# Altium PCB ISL6236_V2.PcbDoc
Units mm, origin at the board's own origin, x right, y up, seen from the top; angles counter-clockwise.
Board outline 50 x 50 mm, 6 copper layers (L1, L2, L3, L4, L5, L6), stack 0.816 mm thick; 41 components, 28 nets, 119 pads, 93 vias.
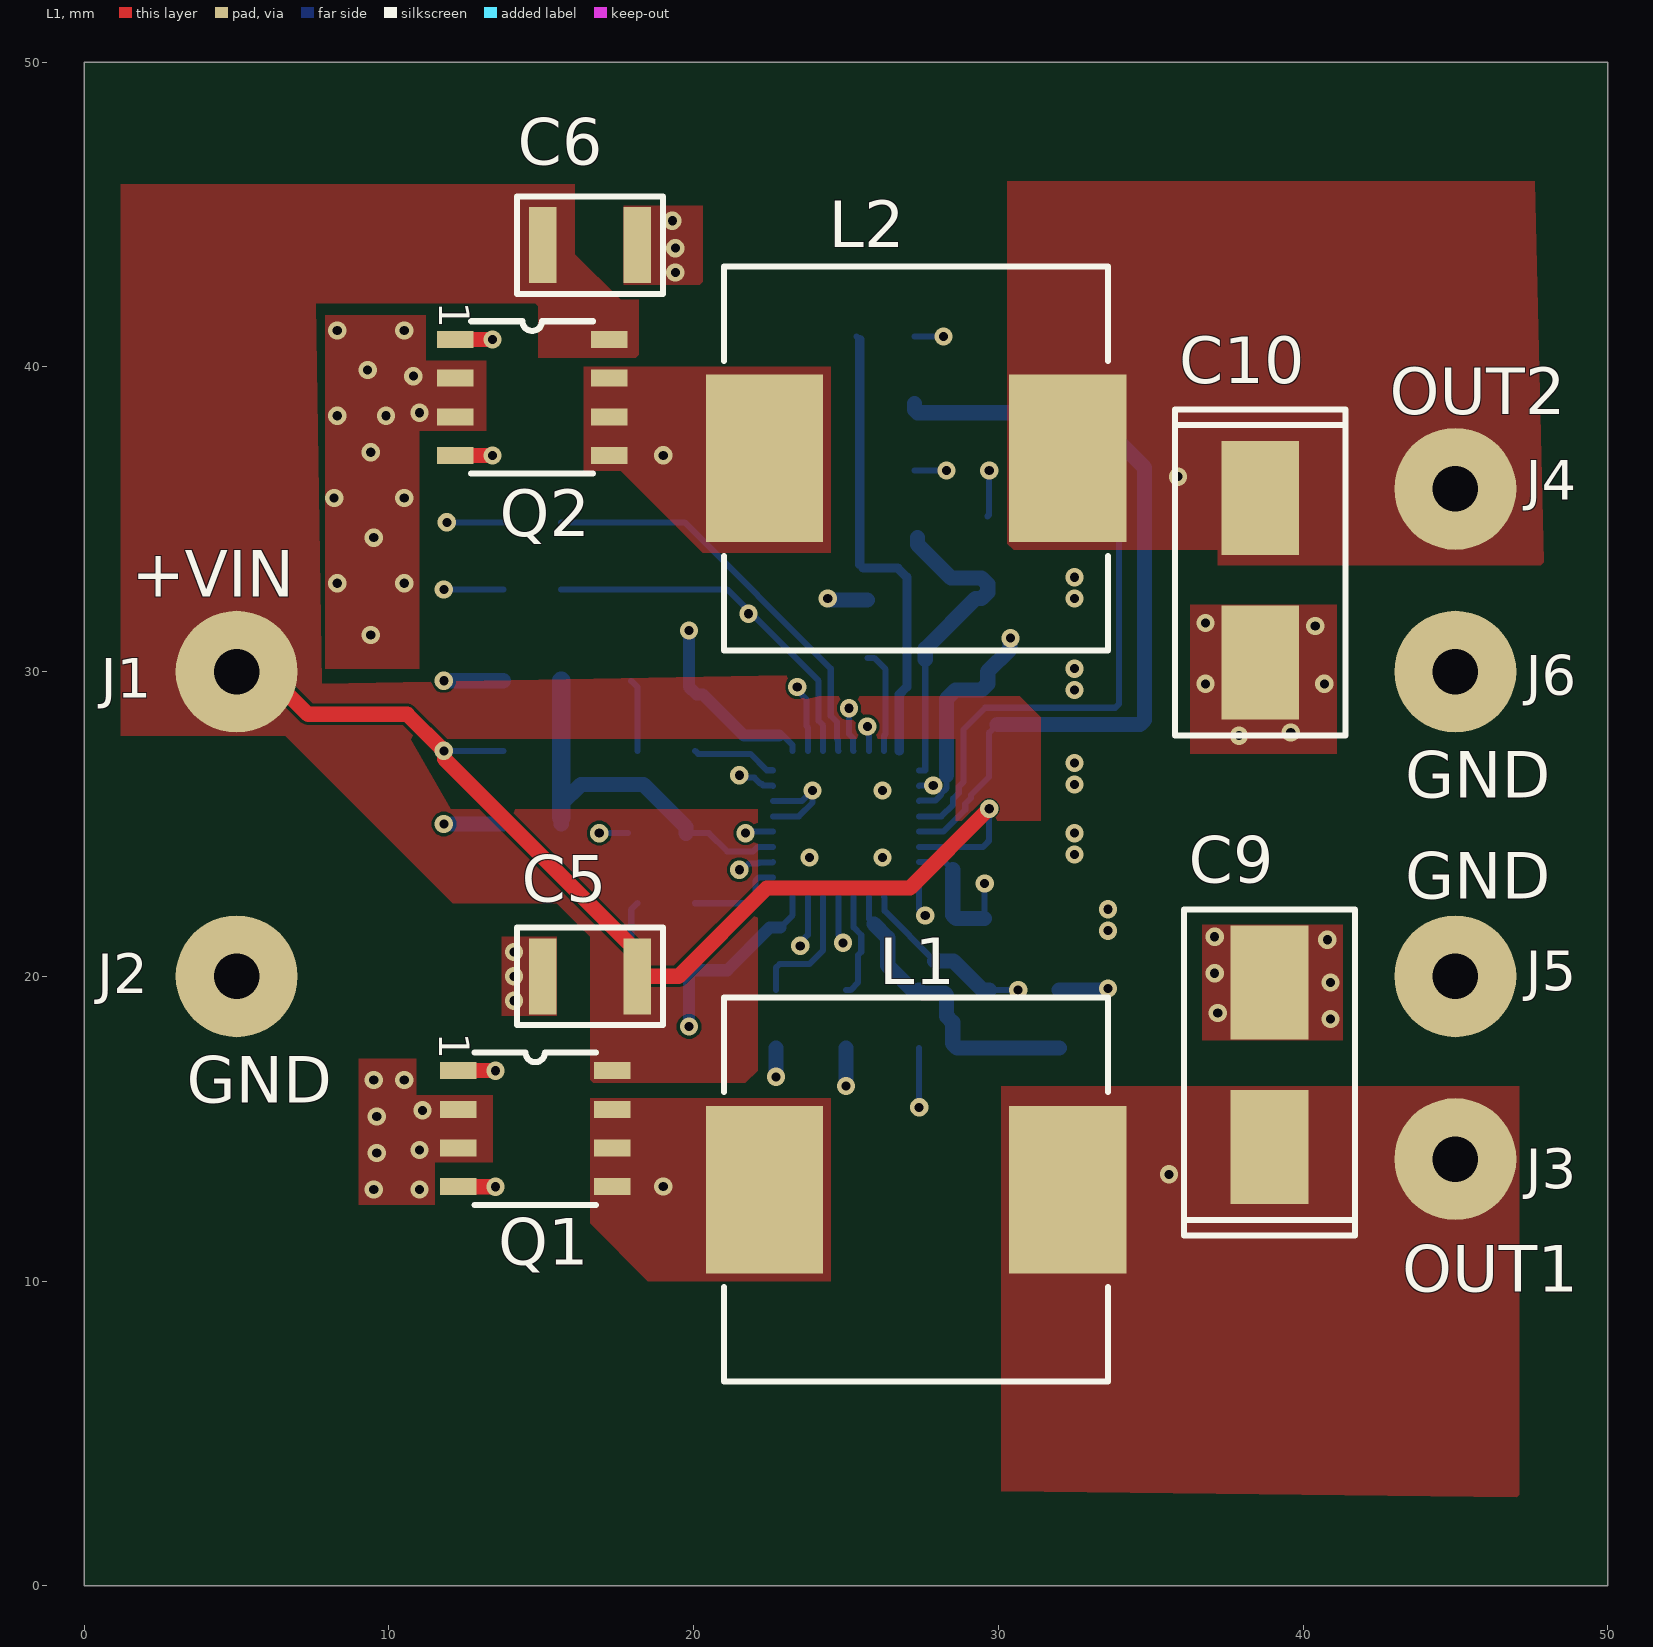
[diagram p0: L1 view]
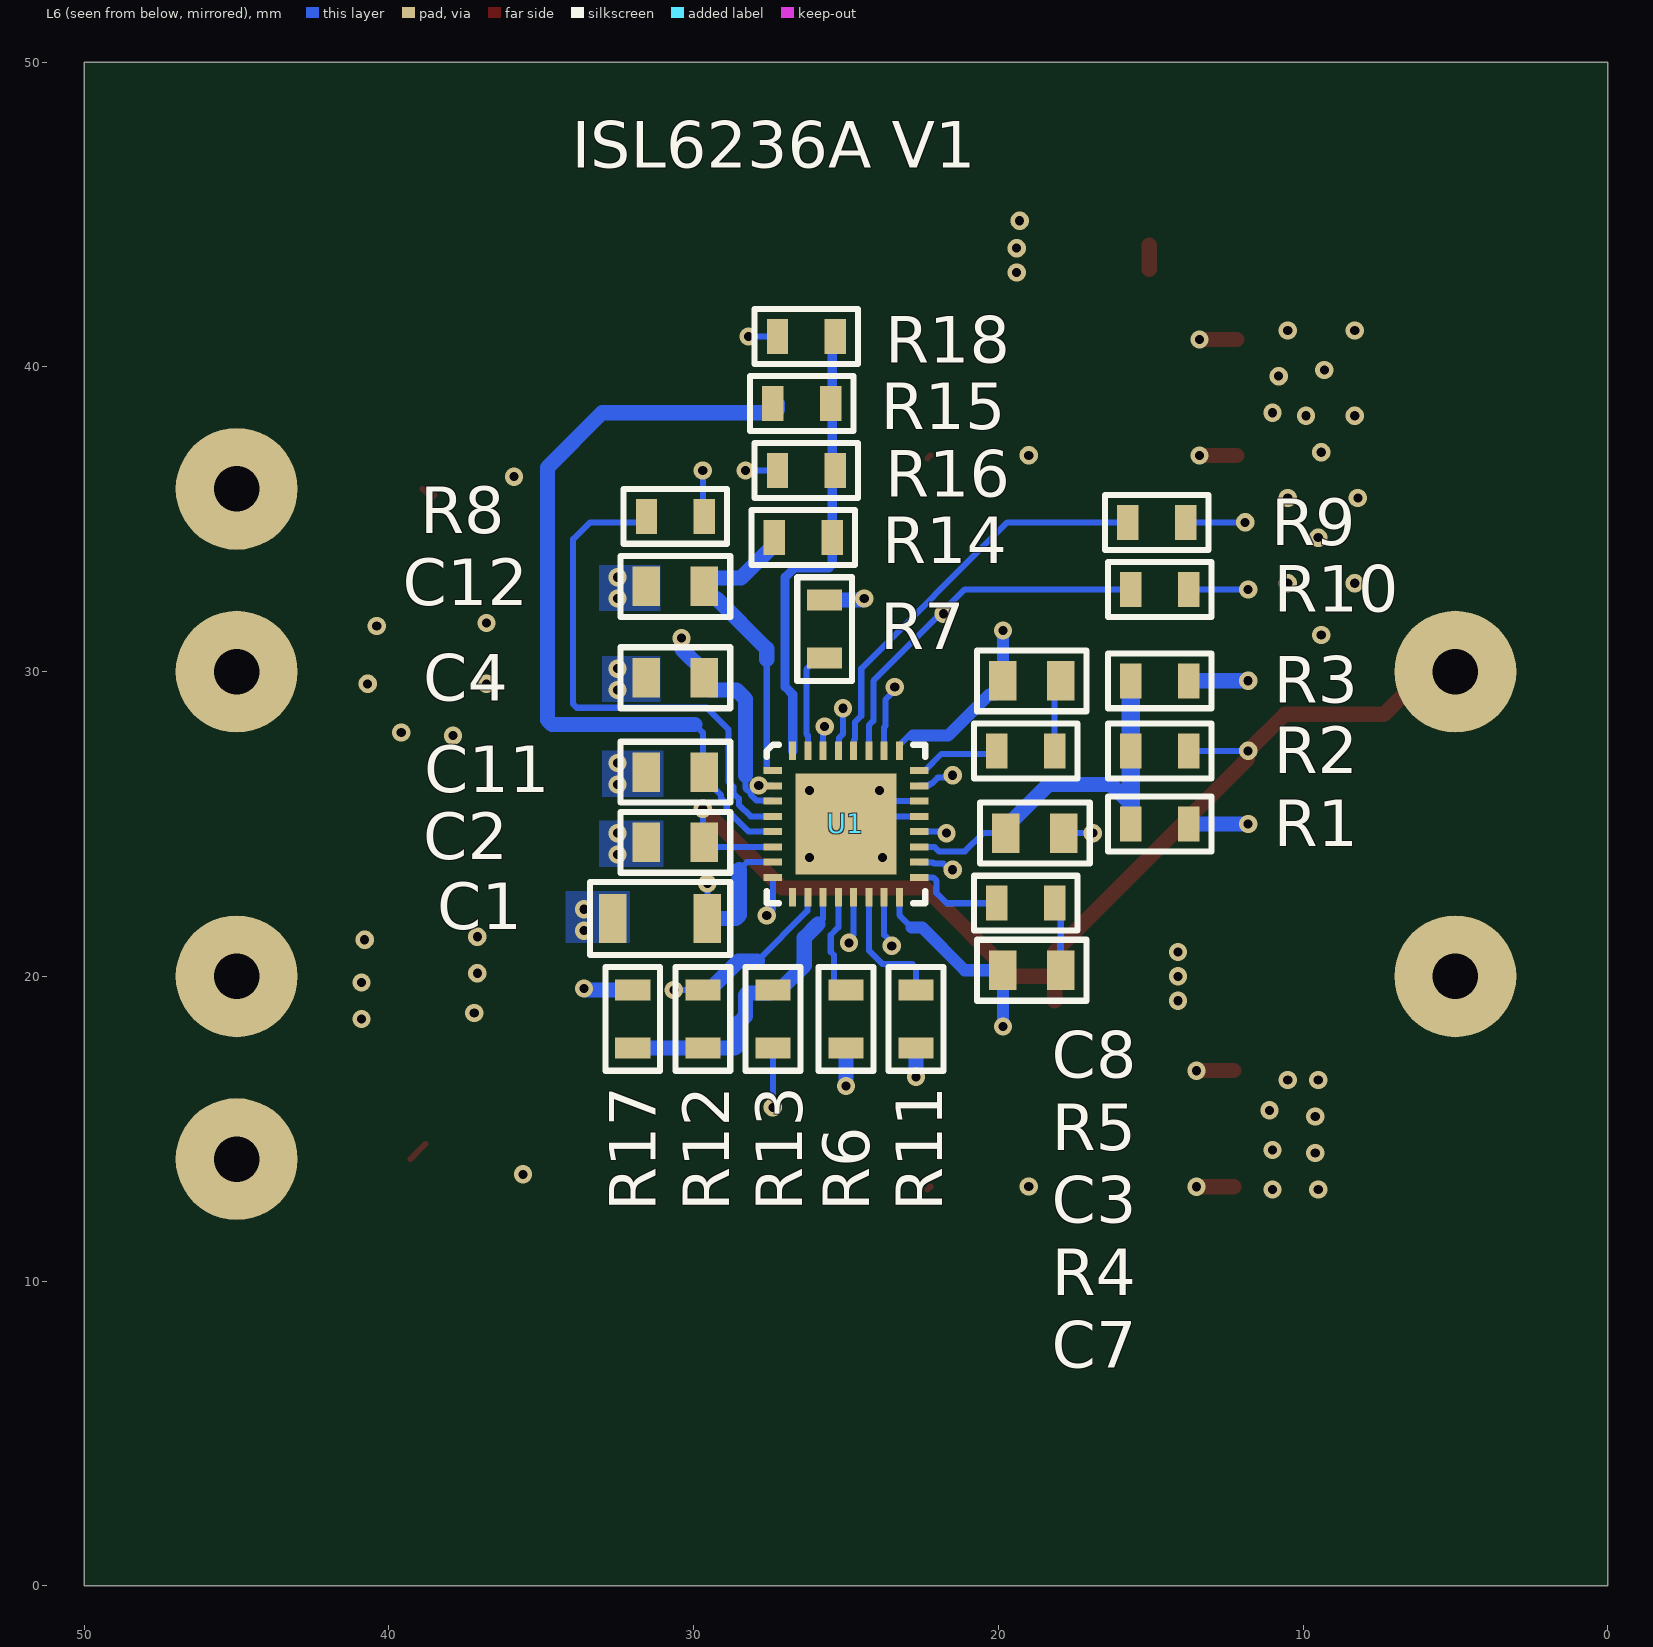
[diagram p1: L6 view, seen from below]
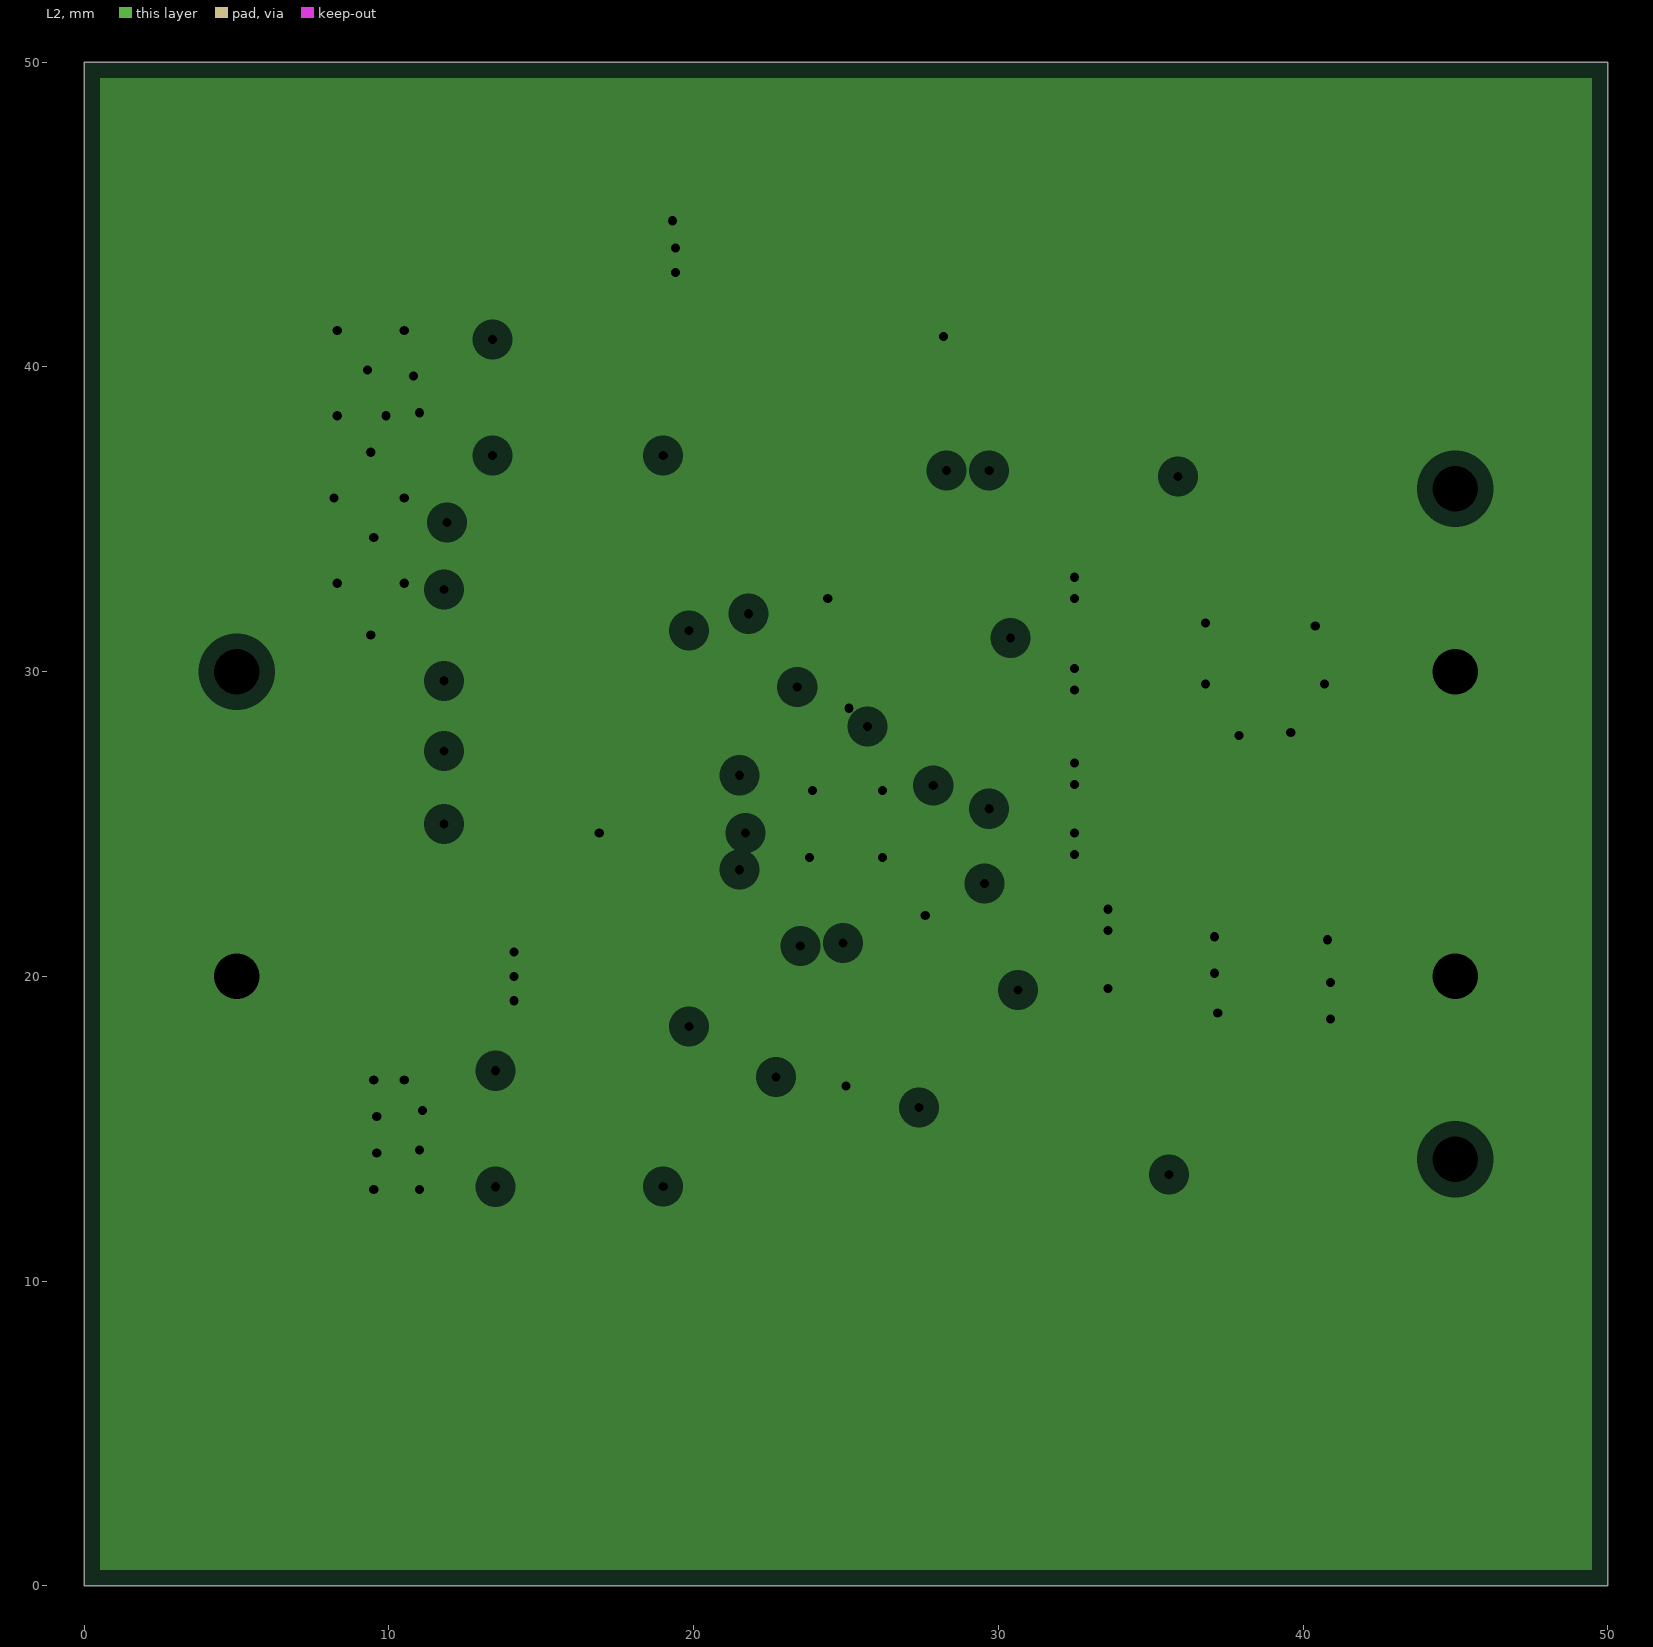
[diagram p2: L2, clearances drawn from the general rule]
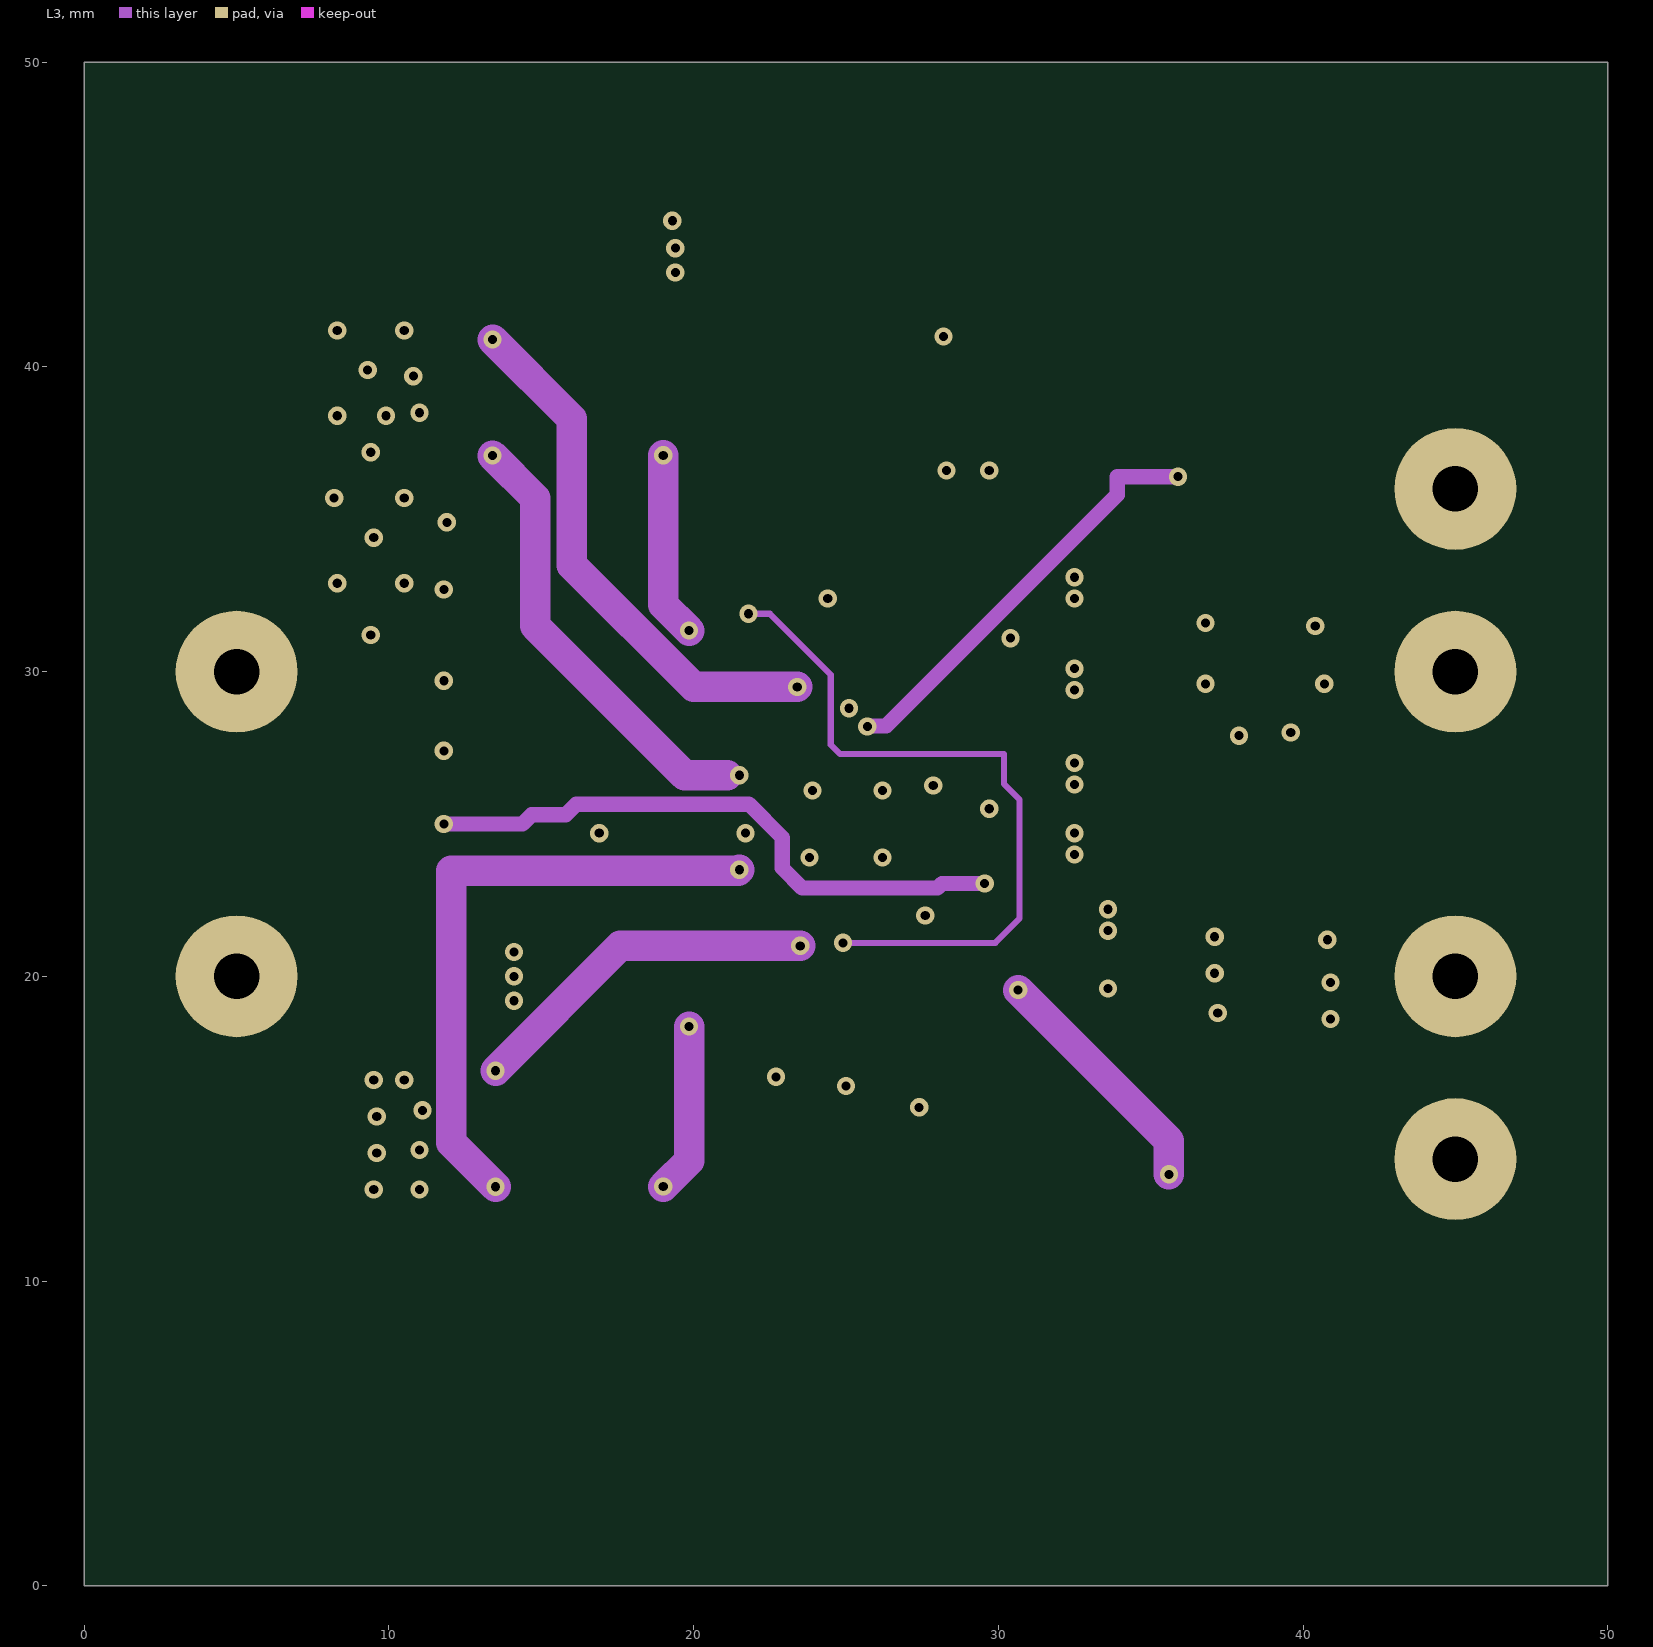
[diagram p3: L3]
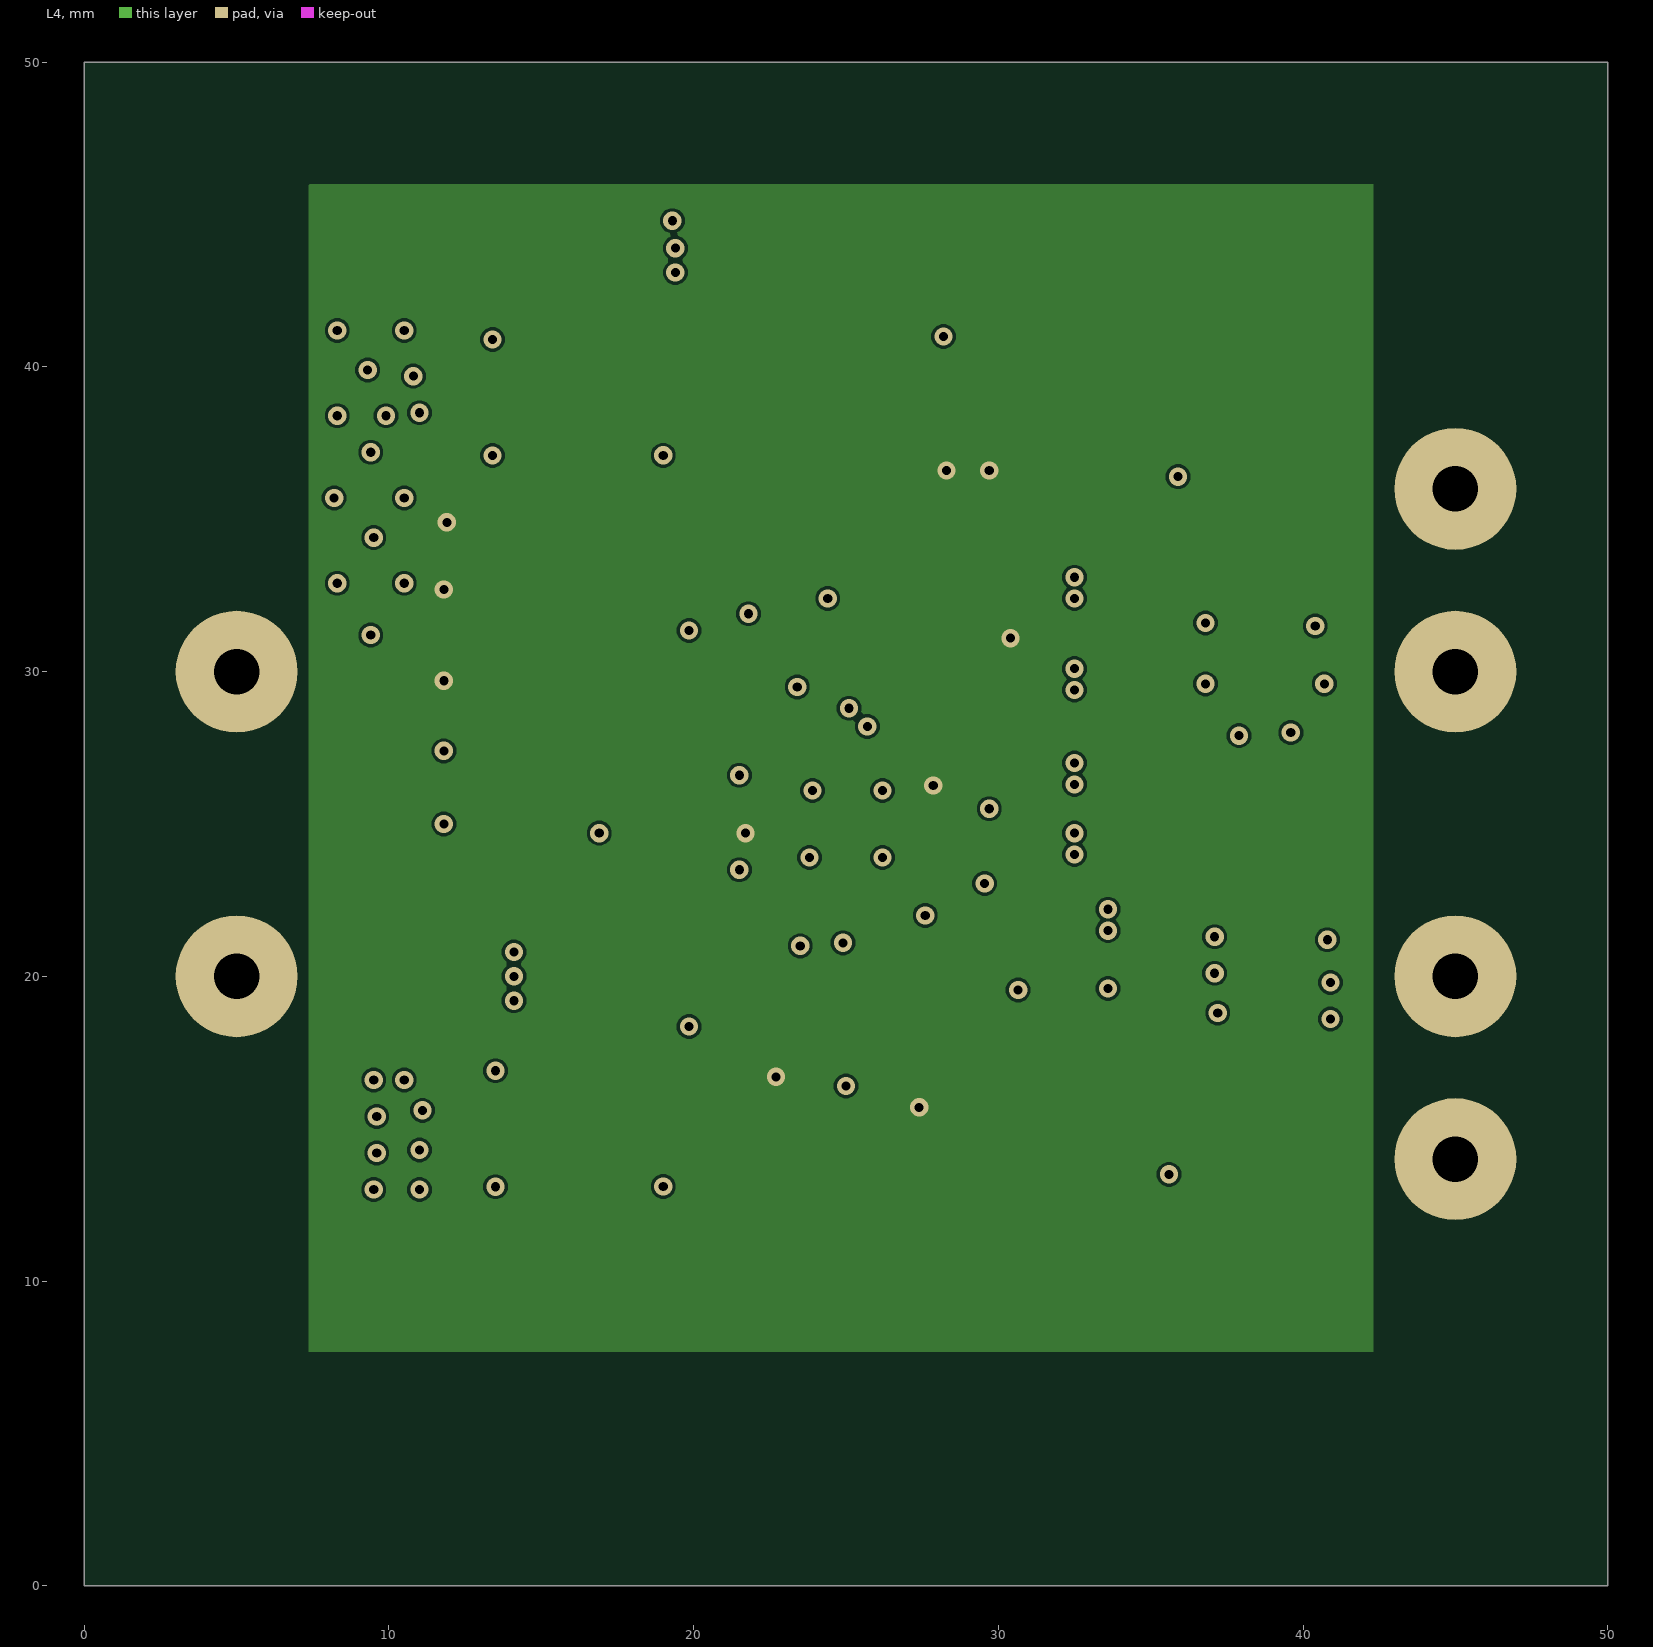
[diagram p4: L4]
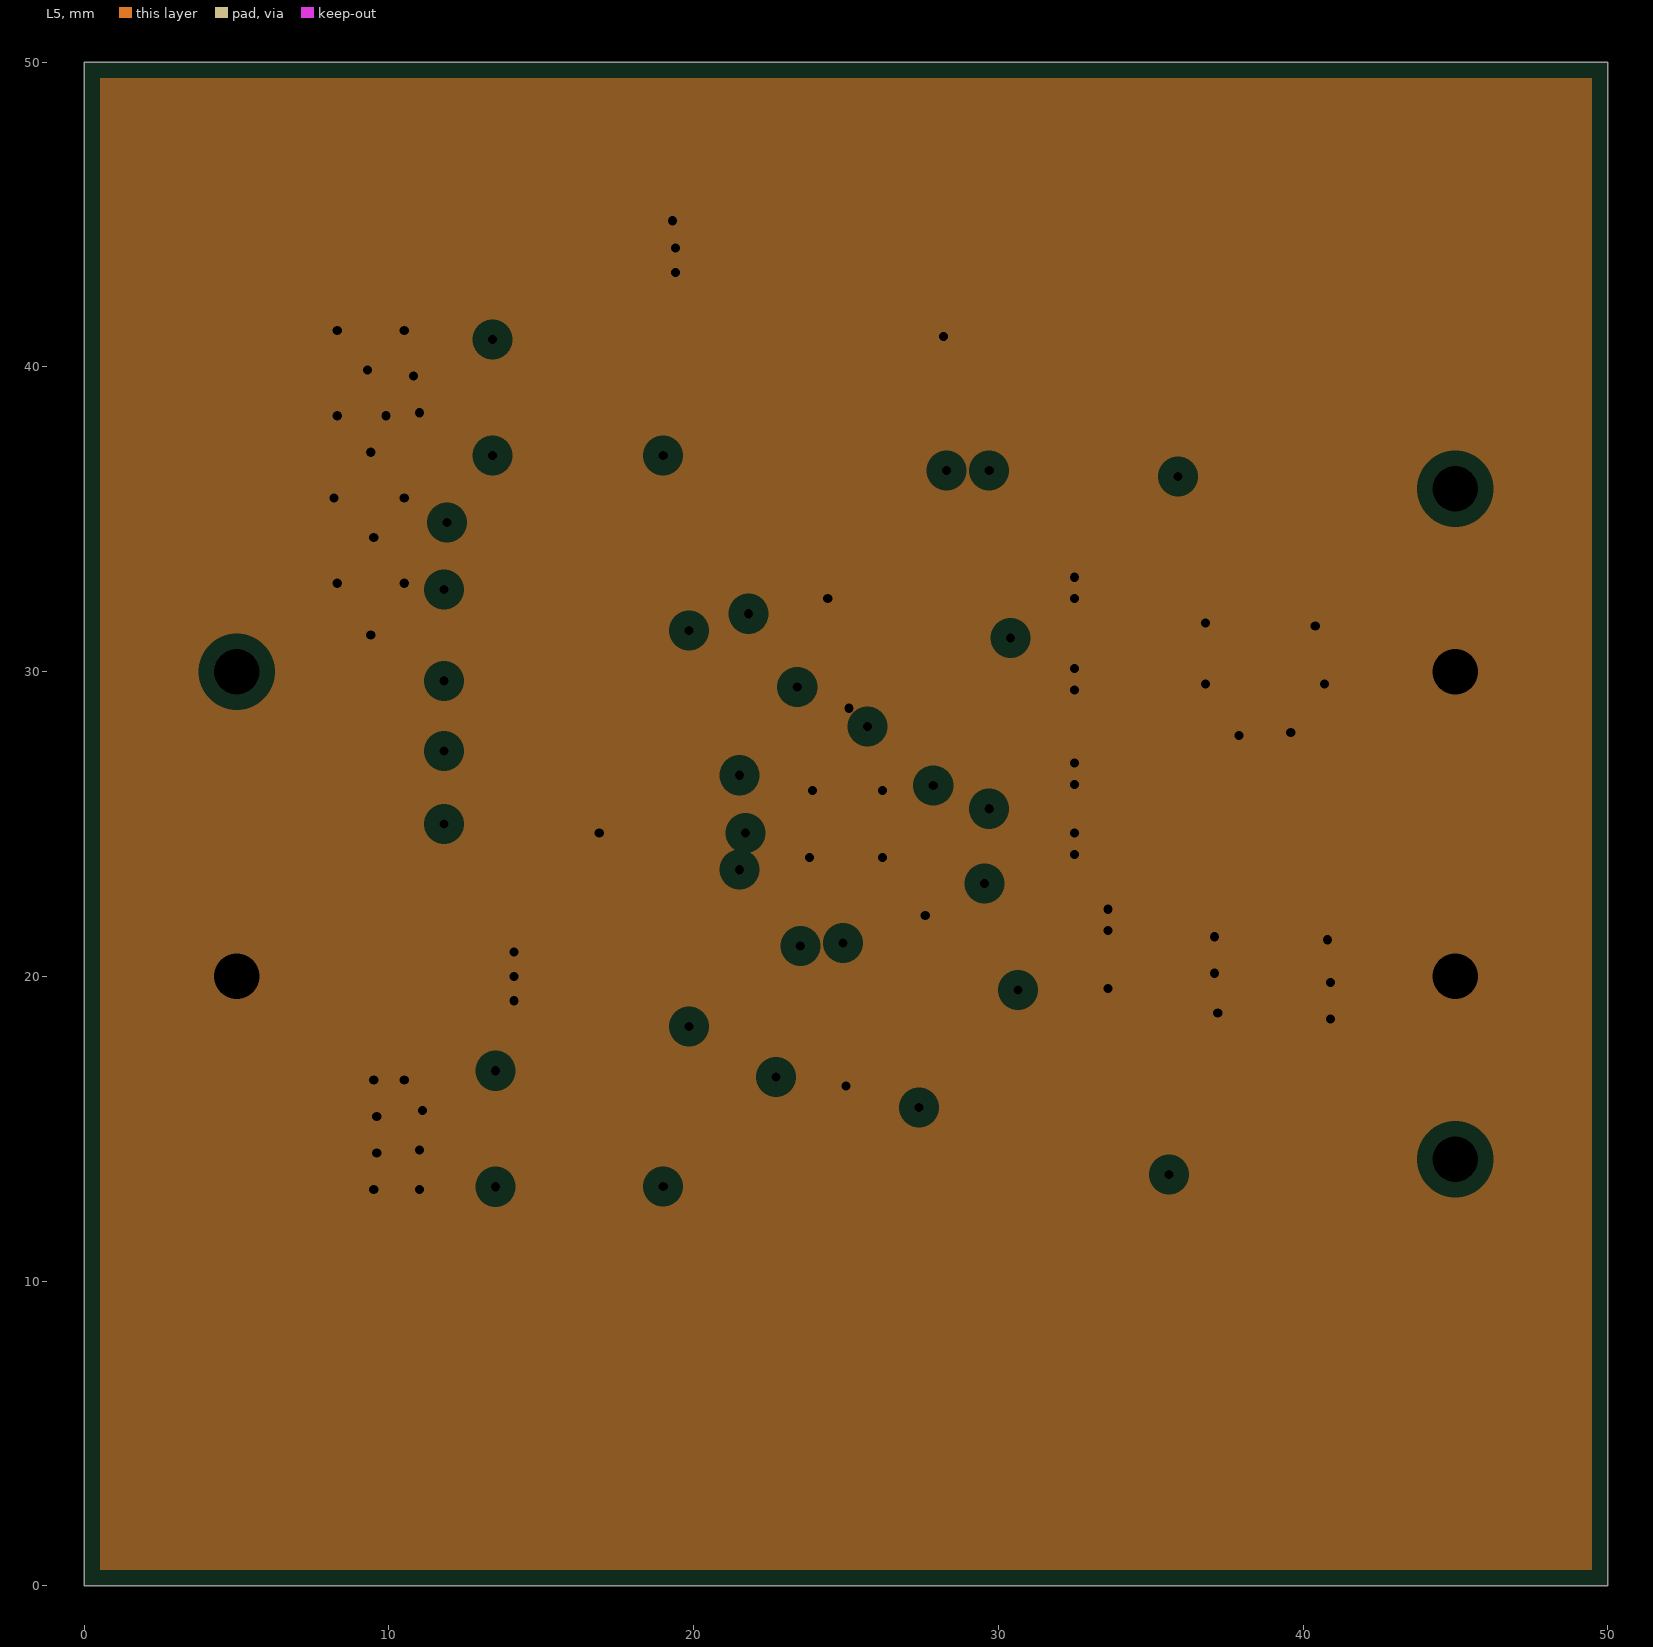
[diagram p5: L5, clearances drawn from the general rule]

## Layer stack, top to bottom
Top Solder: solder mask 0.0102, Solder Resist, Dk 3.5
L1: signal copper 0.0356
Dielectric 2: prepreg 0.0711, PP-006, Dk 4.1
L2: plane copper 0.035, net GND
Dielectric 3: prepreg 0.0711, PP-006, Dk 4.1
L3: signal copper 0.035
Dielectric 4: prepreg 0.0711, PP-006, Dk 4.1
L4: signal copper 0.035
Dielectric 5: prepreg 0.0711, PP-006, Dk 4.1
L5: plane copper 0.035, net GND
Dielectric 1: dielectric 0.32, FR-4, Dk 4.8
L6: signal copper 0.0356
Bottom Solder: solder mask 0.0102, Solder Resist, Dk 3.5

## Board outline
0,0 50,0 50,50 0,50

## Design rules (kind name [scope] priority, off if disabled: settings)
Clearance [All] p1: gap=0.1 ignorepadtopadclearanceinfootprint=FALSE
ComponentClearance [All] p1: gap=0.099 collisioncheckmode=3 verticalgap=0.099 showdistances=FALSE
MinimumSolderMaskSliver [All] p1: minsoldermaskwidth=0.1
PlaneClearance [All] p1: clearance=0.508
PlaneConnect [All] p1: planeconnectstyle=Relief reliefexpansion=0.508 reliefentries=4 reliefconductorwidth=0.254 reliefairgap=0.254
PolygonConnect [All] p1: connectstyle=Direct reliefconductorwidth=0.254 reliefentries=4 polygonreliefangle="90 Angle" airgapwidth=0.254
RoutingVias [All] p1: holewidth=0.3 width=0.6 viastyle="Through Hole" minholewidth=0.3 minwidth=0.6 maxholewidth=0.3 maxwidth=0.6
SilkToSilkClearance [All] p1: silktosilkclearance=0.1
SilkToSolderMaskClearance [IsPad] p1: minsilkscreentomaskgap=0.1 clearancetoexposedcopper=TRUE
SolderMaskExpansion [All] p1: expansion=0.102 istentingtop=FALSE
Width [All] p1: maxlimit=10 minlimit=0.2 preferedwidth=0.2
24 further rules are at their usual default settings.

## Components (designator, comment, footprint, x,y, rotation, side; value= is the part's Value field where it differs from the comment)
C1 "4.7uF, 10V" C1206 31.1,21.9 r180 bottom
C2 "1uF, 50V" C0805 30.6,24.4 r180 bottom
C3 "1uF, 50V" C0805 18.8,24.7 r0 bottom
C4 "1uF, 50V" C0805 30.6,29.8 r180 bottom
C5 "10uF, 50V" CAP1210 16.6,20 r0 top
C6 "10uF, 50V" CAP1210 16.6,44 r180 top
C7 "100nF" C0805 18.9,20.2 r180 bottom
C8 "220nF" C0805 18.9,29.7 r0 bottom
C9 "330uF, 10V" CAP_734343 38.9,17.1 r90 top
C10 "330uF, 10V" CAP_734343 38.6,33 r270 top
C11 "10nF" C0805 30.6,26.7 r0 bottom
C12 "100nF" C0805 30.6,32.8 r0 bottom
J1 "4MM*1.5MM" PAD_WITH_HOLE_4MMx1.5MM 5,30 r0 top
J2 "4MM*1.5MM" PAD_WITH_HOLE_4MMx1.5MM 5,20 r0 top
J3 "4MM*1.5MM" PAD_WITH_HOLE_4MMx1.5MM 45,14 r0 top
J4 "4MM*1.5MM" PAD_WITH_HOLE_4MMx1.5MM 45,36 r0 top
J5 "4MM*1.5MM" PAD_WITH_HOLE_4MMx1.5MM 45,20 r0 top
J6 "4MM*1.5MM" PAD_WITH_HOLE_4MMx1.5MM 45,30 r0 top
L1 "3u3, DR125-3R3-R" DR125 27.3,13 r180 top
L2 "2u2, DR125-2R2-R" DR125 27.3,37 r0 top
Q1 "SI4816BDY-T1-E3" SO-8 14.8,15 r0 top
Q2 "SI4816BDY-T1-E3" SO-8 14.7,39 r0 top
R1 "0R" R0805KTR10 14.7,25 r180 bottom
R2 "0R" R0805KTR10 14.7,27.4 r0 bottom
R3 "10R" R0805KTR10 14.7,29.7 r180 bottom
R4 "1R" R0805KTR10 19.1,22.4 r0 bottom
R5 "1R" R0805KTR10 19.1,27.4 r180 bottom
R6 "200k" R0805KTR10 25,18.6 r90 bottom
R7 "200k" R0805KTR10 25.7,31.4 r90 bottom
R8 "10K" R0805KTR10 30.6,35.1 r180 bottom
R9 "200k" R0805KTR10 14.8,34.9 r180 bottom
R10 "200k" R0805KTR10 14.7,32.7 r180 bottom
R11 "10K" R0805KTR10 22.7,18.6 r270 bottom
R12 "DNF" R0805KTR10 29.7,18.6 r90 bottom
R13 "0R" R0805KTR10 27.4,18.6 r270 bottom
R14 "DNF" R0805KTR10 26.4,34.4 r0 bottom
R15 "0R" R0805KTR10 26.45,38.8 r0 bottom
R16 "DNF" R0805KTR10 26.3,36.6 r0 bottom
R17 "DNF" R0805KTR10 32,18.6 r270 bottom
R18 "DNF" R0805KTR10 26.3,41 r180 bottom
U1 "ISL6236AIRZ-T" L3255xB 25,25 r180 bottom

## Footprints (in the part's own frame and the unit in brackets; to place one, negate y for a bottom-side part, rotate by r counter-clockwise, add the part's x,y. Pads: shape width x height; smd on the part's side, far side on the other; paste and mask are expansions set on the pad)
C0805 [mm]
  rect 0.9x1.3 smd: 1(-0.95,0) 2(0.95,0)
  silkscreen extent -1.8,-1 1.8,1
C1206 [mm]
  rect 0.9x1.6 smd: 1(-1.55,0) 2(1.55,0)
  silkscreen extent -2.3,-1.2 2.3,1.2
CAP1210 [mm]
  rect 0.9x2.5 smd: 1(-1.55,0) 2(1.55,0)
  silkscreen extent -2.4,-1.6 2.4,1.6
CAP_734343 [mm]
  rect 3.75x2.55 smd: 1(-2.7,0) 2(2.7,0)
  silkscreen extent -5.6,-2.8 5.1,2.8
DR125 [mm]
  rect 3.85x5.5 smd: 1(-4.975,0) 2(4.975,0)
  silkscreen extent -6.3,-6.3 6.3,6.3
L3255xB [mm]
  rect 0.6x0.23 smd paste+0.051 mask+0.051: 1(-2.4,1.75) 2(-2.4,1.25) 3(-2.4,0.75) 4(-2.4,0.25) 5(-2.4,-0.25) 6(-2.4,-0.75) 7(-2.4,-1.25) 8(-2.4,-1.75) 17(2.4,-1.75) 18(2.4,-1.25) 19(2.4,-0.75) 20(2.4,-0.25) 21(2.4,0.25) 22(2.4,0.75) 23(2.4,1.25) 24(2.4,1.75)
  rect 0.23x0.6 smd paste+0.051 mask+0.051: 9(-1.75,-2.4) 10(-1.25,-2.4) 11(-0.75,-2.4) 12(-0.25,-2.4) 13(0.25,-2.4) 14(0.75,-2.4) 15(1.25,-2.4) 16(1.75,-2.4) 25(1.75,2.4) 26(1.25,2.4) 27(0.75,2.4) 28(0.25,2.4) 29(-0.25,2.4) 30(-0.75,2.4) 31(-1.25,2.4) 32(-1.75,2.4)
  rect 3.3x3.3 smd paste+0.051 mask+0.051: 33(0,0)
  silkscreen extent -2.6,-2.6 2.6,2.6
PAD_WITH_HOLE_4MMx1.5MM [mm]
  round 4 hole 1.5: 1(0,0)
R0805KTR10 [mm]
  rect 0.7x1.15 smd: 1(-0.95,0) 2(0.95,0)
  silkscreen extent -1.7,-0.9 1.7,0.9
SO-8 [mm]
  rect 1.194x0.559 smd: 1(-2.527,1.905) 2(-2.527,0.635) 3(-2.527,-0.635) 4(-2.527,-1.905) 5(2.527,-1.905) 6(2.527,-0.635) 7(2.527,0.635) 8(2.527,1.905)
  silkscreen extent -2,-2.5 2,2.5

## Part data
C1: library part 1206ZD475JAT2A, "Multilayer Ceramic Capacitors MLCC - SMD/SMT 10V 4.7uF X5R 1206 5% Tol", Capacitance=4.7uF, Case Code (Imperial)=1206, Case Code (Metric)=3216, Dielectric=X5R, Manufacturer="Kyocera AVX", Max Operating Temperature=85°C, Min Operating Temperature=-55°C, Package Quantity=2000, Supplier Part Number 1=478-12253-1-ND, Tolerance=5%, Voltage Rating=10V, Case/Package=1206, Category="Ceramic Capacitors", ComponentLink1Description=https://datasheet.ciiva.com/11570/cx5r-11570917.pdf?src-supplier=Avnet, ComponentLink1URL=https://datasheet.ciiva.com/11570/cx5r-11570917.pdf?src-supplier=Avnet, ComponentLink2Description=https://datasheet.ciiva.com/6268/cx5r-6268857.pdf?src-supplier=Digi-Key, ComponentLink2URL=https://datasheet.ciiva.com/6268/cx5r-6268857.pdf?src-supplier=Digi-Key, Depth=1.6mm, Height=0.07mm, Length=3.2mm, Manufacturer Part Number=1206ZD475JAT2A, Mount="Surface Mount", Packaging="Tape and Reel", Pricing 1="1=1.31000, 10=1.03500, 50=0.89700, 100=0.77620, 500=0.58650, 1000=0.51750 (USD)", Radiation Hardening=No, RoHS=Yes, Stock 1=9486, Supplier 1=Digi-Key, Termination=SMD/SMT, Thickness=0.037inch, Voltage Rating (DC)=10V, Weight=0.000571oz, Width=0.063inch
C2 C3 C4: library part C2012X7R1H105K125AB, "TDK - C2012X7R1H105K125AB - SMD Multilayer Ceramic Capacitor, 1 µF, 50 V, 0805 [2012 Metric], ± 10%, X7R, C Series TDK", Capacitance=1uF, Case Code (Imperial)=0805, Case Code (Metric)=2012, Dielectric=X7R, Dielectric Material=Ceramic, Manufacturer=TDK, Max Operating Temperature=125°C, Min Operating Temperature=-55°C, Package Quantity=1, Supplier Part Number 1=445-7547-1-ND, Tolerance=10%, Voltage Rating=50V, Case/Package=0805, Category="Ceramic Capacitors", ComponentLink1Description=https://datasheet.ciiva.com/22718/1796654-22718037.pdf?src-supplier=Element14, ComponentLink1URL=https://datasheet.ciiva.com/22718/1796654-22718037.pdf?src-supplier=Element14, ComponentLink2Description=https://datasheet.ciiva.com/6274/tdkmlcccaprange-6274890.pdf?src-supplier=Digi-Key, ComponentLink2URL=https://datasheet.ciiva.com/6274/tdkmlcccaprange-6274890.pdf?src-supplier=Digi-Key, ComponentLink3Description=https://datasheet.ciiva.com/23803/1796654-23803036.pdf?src-supplier=Newark, ComponentLink3URL=https://datasheet.ciiva.com/23803/1796654-23803036.pdf?src-supplier=Newark, ComponentLink4Description=https://datasheet.ciiva.com/28673/mlcc-commercial-general-en-28673565.pdf?src-supplier=Element14, ComponentLink4URL=https://datasheet.ciiva.com/28673/mlcc-commercial-general-en-28673565.pdf?src-supplier=Element14, ComponentLink5Description=https://datasheet.ciiva.com/6274/tdkmlcccaprange-6274886.pdf?src-supplier=Digi-Key, ComponentLink5URL=https://datasheet.ciiva.com/6274/tdkmlcccaprange-6274886.pdf?src-supplier=Digi-Key, ComponentLink6Description=https://datasheet.ciiva.com/6274/tdkmlcccaprange-6274888.pdf?src-supplier=Digi-Key, ComponentLink6URL=https://datasheet.ciiva.com/6274/tdkmlcccaprange-6274888.pdf?src-supplier=Digi-Key, ComponentLink7Description=https://datasheet.ciiva.com/24191/general-b11-24191449.pdf?src-supplier=Future+Electronics, ComponentLink7URL=https://datasheet.ciiva.com/24191/general-b11-24191449.pdf?src-supplier=Future+Electronics, Construction=Flat, Depth=1.25mm, Height=1.25mm, Lead Free="Lead Free", Length=2mm, Manufacturer Part Number=C2012X7R1H105K125AB, Mount="Surface Mount", Number of Pins=2, Packaging="Tape and Reel", Pricing 1="1=0.31000, 10=0.21500, 50=0.14360, 100=0.12200, 500=0.08612, 1000=0.07535 (USD)", Radiation Hardening=No, REACH SVHC="No SVHC", Resistor Type=Ceramic, RoHS=Yes, RoHS Compliant=Yes, Series=C, Stock 1=19543, Supplier 1=Digi-Key, Termination=SMD/SMT, Thickness=0.057inch, Voltage Rating (DC)=50V, Weight=0.000194oz, Width=0.049inch
C5 C6: library part UMK325BJ106KM-T, "Cap Ceramic 10uF 50V X5R 10% SMD 1210 85C T/R", Capacitance=10uF, Case Code (Imperial)=1210, Case Code (Metric)=3225, Dielectric=X5R, Manufacturer="Taiyo Yuden", Max Operating Temperature=85°C, Min Operating Temperature=-55°C, Package Quantity=500, Supplier Part Number 1=587-2247-1-ND, Tolerance=10%, Voltage=50V, Case/Package=1210, Category="Ceramic Capacitors", ComponentLink1Description=https://datasheet.ciiva.com/30176/194umk325bj106km-t-30176008.pdf?src-supplier=Onlinecomponents.com, ComponentLink1URL=https://datasheet.ciiva.com/30176/194umk325bj106km-t-30176008.pdf?src-supplier=Onlinecomponents.com, ComponentLink2Description=https://datasheet.ciiva.com/30051/155umk325bj106km-t-30051915.pdf?src-supplier=Onlinecomponents.com, ComponentLink2URL=https://datasheet.ciiva.com/30051/155umk325bj106km-t-30051915.pdf?src-supplier=Onlinecomponents.com, ComponentLink3Description=https://datasheet.ciiva.com/141/mlcc-all-e-141385.pdf?src-supplier=Digi-Key, ComponentLink3URL=https://datasheet.ciiva.com/141/mlcc-all-e-141385.pdf?src-supplier=Digi-Key, ComponentLink4Description=https://datasheet.ciiva.com/141/mlcc-all-e-141386.pdf?src-supplier=Digi-Key, ComponentLink4URL=https://datasheet.ciiva.com/141/mlcc-all-e-141386.pdf?src-supplier=Digi-Key, ComponentLink5Description=https://datasheet.ciiva.com/22694/1497285-22694282.pdf?src-supplier=Element14, ComponentLink5URL=https://datasheet.ciiva.com/22694/1497285-22694282.pdf?src-supplier=Element14, ComponentLink6Description=https://datasheet.ciiva.com/141/mlcc-all-e-141387.pdf?src-supplier=Digi-Key, ComponentLink6URL=https://datasheet.ciiva.com/141/mlcc-all-e-141387.pdf?src-supplier=Digi-Key, ComponentLink7Description=https://datasheet.ciiva.com/5412/mlcc01-e-5412012.pdf?src-supplier=Mouser, ComponentLink7URL=https://datasheet.ciiva.com/5412/mlcc01-e-5412012.pdf?src-supplier=Mouser, ComponentLink8Description=https://datasheet.ciiva.com/7975/1497285-7975566.pdf?src-supplier=Element14, ComponentLink8URL=https://datasheet.ciiva.com/7975/1497285-7975566.pdf?src-supplier=Element14, ComponentLink9Description=https://datasheet.ciiva.com/15922/cmultilayerceramiccapacitor-15922702.pdf?src-supplier=Onlinecomponents.com, ComponentLink9URL=https://datasheet.ciiva.com/15922/cmultilayerceramiccapacitor-15922702.pdf?src-supplier=Onlinecomponents.com, ComponentLink10Description=https://datasheet.ciiva.com/22748/1910934-22748126.pdf?src-supplier=Element14, ComponentLink10URL=https://datasheet.ciiva.com/22748/1910934-22748126.pdf?src-supplier=Element14, Construction=Flat, Contact Plating=Nickel, Depth=2.5mm, Halogen Free="Halogen Free", Height=2.5mm, Lead Free="Lead Free", Length=0.126inch, Manufacturer Part Number=UMK325BJ106KM-T, Mount="Surface Mount", Number of Pins=2, Packaging="Tape and Reel", Pricing 1="1=0.71000, 10=0.52300, 50=0.41860, 100=0.35880 (USD)", Radiation Hardening=No, REACH SVHC="No SVHC", RoHS=Yes, RoHS Compliant=Yes, Series=M, Stock 1=128928, Supplier 1=Digi-Key, Termination=SMD/SMT, Thickness=0.106inch, Voltage Rating=50V, Voltage Rating (DC)=50V, Width=0.098inch
C7 C12: library part C2012X7R1H104K085AA, "TDK - C2012X7R1H104K085AA - SMD Multilayer Ceramic Capacitor, 0.1 µF, 50 V, 0805 [2012 Metric], ± 10%, X7R, C Series", Case Code (Imperial)=0805, Case Code (Metric)=2012, Dielectric=X7R, Dielectric Material=Ceramic, Manufacturer=TDK, Max Operating Temperature=125°C, Min Operating Temperature=-55°C, Package Quantity=1, Supplier Part Number 1=445-7534-1-ND, Tolerance=10%, Voltage=50V, Capacitance=100nF, Case/Package=0805, Category="Ceramic Capacitors", ComponentLink1Description=https://datasheet.ciiva.com/11788/0900766b80c1bb00-11788128.pdf?src-supplier=RSComponents, ComponentLink1URL=https://datasheet.ciiva.com/11788/0900766b80c1bb00-11788128.pdf?src-supplier=RSComponents, ComponentLink2Description=https://datasheet.ciiva.com/6250/tdkmlcccaprange-6250821.pdf?src-supplier=Digi-Key, ComponentLink2URL=https://datasheet.ciiva.com/6250/tdkmlcccaprange-6250821.pdf?src-supplier=Digi-Key, ComponentLink3Description=https://datasheet.ciiva.com/24191/e412-c-24191447.pdf?src-supplier=Future+Electronics, ComponentLink3URL=https://datasheet.ciiva.com/24191/e412-c-24191447.pdf?src-supplier=Future+Electronics, ComponentLink4Description=https://datasheet.ciiva.com/6250/tdkmlcccaprange-6250824.pdf?src-supplier=Digi-Key, ComponentLink4URL=https://datasheet.ciiva.com/6250/tdkmlcccaprange-6250824.pdf?src-supplier=Digi-Key, ComponentLink5Description=https://datasheet.ciiva.com/23803/1796654-23803035.pdf?src-supplier=Newark, ComponentLink5URL=https://datasheet.ciiva.com/23803/1796654-23803035.pdf?src-supplier=Newark, ComponentLink6Description=https://datasheet.ciiva.com/28602/1571323-28602204.pdf?src-supplier=Element14, ComponentLink6URL=https://datasheet.ciiva.com/28602/1571323-28602204.pdf?src-supplier=Element14, Construction=Flat, Depth=1.25mm, Height=0.85mm, Lead Free="Lead Free", Length=2mm, Manufacturer Part Number=C2012X7R1H104K085AA, Mount="Surface Mount", Number of Pins=2, Packaging="Tape and Reel", Pricing 1="1=0.15000, 10=0.10900, 50=0.06160, 100=0.05100, 500=0.03578, 1000=0.02962 (USD)", Radiation Hardening=No, REACH SVHC="No SVHC", Resistor Type=Ceramic, RoHS=Yes, RoHS Compliant=Yes, Series=C, Stock 1=36540, Supplier 1=Digi-Key, Termination=SMD/SMT, Thickness=0.037inch, Voltage Rating=50V, Voltage Rating (DC)=50V, Weight=0.000194oz, Width=0.049inch
C8: library part C2012X7R1H224K125AA, "CERAMIC CAPACITOR 0.22UF, 50V, X7R, 10%, 0805, FULL REEL; Product Range:C Series; Capacitance:0.22 F; Capacitance Tolerance:  10%; Dielectric Characteristic:X7R; Voltage Rating:50V; Ceramic Capacitor Case:0805 ^2012 Metric]; MSL:-", Case Code (Imperial)=0805, Case Code (Metric)=2012, Dielectric=X7R, Dielectric Material=Ceramic, Manufacturer=TDK, Max Operating Temperature=125°C, Min Operating Temperature=-55°C, Package Quantity=1, Supplier Part Number 1=445-1350-1-ND, Tolerance=10%, Voltage=50V, Capacitance=220nF, Case/Package=0805, Category="Ceramic Capacitors", ComponentLink1Description=https://datasheet.ciiva.com/11788/0900766b80c1bb00-11788127.pdf?src-supplier=RSComponents, ComponentLink1URL=https://datasheet.ciiva.com/11788/0900766b80c1bb00-11788127.pdf?src-supplier=RSComponents, ComponentLink2Description=https://datasheet.ciiva.com/17487/e412-c-17487255.pdf?src-supplier=Avnet+Europe, ComponentLink2URL=https://datasheet.ciiva.com/17487/e412-c-17487255.pdf?src-supplier=Avnet+Europe, ComponentLink3Description=https://datasheet.ciiva.com/6292/tdkmlcccaprange-6292269.pdf?src-supplier=Digi-Key, ComponentLink3URL=https://datasheet.ciiva.com/6292/tdkmlcccaprange-6292269.pdf?src-supplier=Digi-Key, ComponentLink4Description=https://datasheet.ciiva.com/16427/e412-c-16427832.pdf?src-supplier=Future+Electronics, ComponentLink4URL=https://datasheet.ciiva.com/16427/e412-c-16427832.pdf?src-supplier=Future+Electronics, ComponentLink5Description=https://datasheet.ciiva.com/28602/1571323-28602205.pdf?src-supplier=Element14, ComponentLink5URL=https://datasheet.ciiva.com/28602/1571323-28602205.pdf?src-supplier=Element14, Construction=Flat, Depth=1.25mm, Height=1.25mm, Lead Free="Lead Free", Length=2mm, Manufacturer Part Number=C2012X7R1H224K125AA, Mount="Surface Mount", Number of Pins=2, Packaging="Tape and Reel", Pricing 1="1=0.17000, 10=0.12100, 50=0.06880, 100=0.05700, 500=0.03998, 1000=0.03310 (USD)", Radiation Hardening=No, REACH SVHC="No SVHC", Resistor Type=Ceramic, RoHS=Yes, RoHS Compliant=Yes, Series=C, Stock 1=44733, Supplier 1=Digi-Key, Termination=SMD/SMT, Thickness=0.057inch, Voltage Rating=50V, Voltage Rating (DC)=50V, Weight=0.000194oz, Width=0.049inch
C9 C10: library part T530X337M010ATE004, "Tantalum Capacitors - Polymer SMD 330uF 10volts 20%", Capacitance=330uF, Case Code (Imperial)=2917, Case Code (Metric)=7343, ESR (Equivalent Series Resistance)=4mR, Leakage Current=330uA, Manufacturer=KEMET, Max Operating Temperature=125°C, Min Operating Temperature=-55°C, Package Quantity=500, Ripple Current=8.2A, Supplier Part Number 1=399-10378-1-ND, Tolerance=20%, Voltage=10V, Case/Package=2917, Category="Polymer Capacitors", ComponentLink1Description=https://datasheet.ciiva.com/11794/0900766b80deaa91-11794477.pdf?src-supplier=RSComponents, ComponentLink1URL=https://datasheet.ciiva.com/11794/0900766b80deaa91-11794477.pdf?src-supplier=RSComponents, ComponentLink2Description=https://datasheet.ciiva.com/14593/70096008-14593753.pdf?src-supplier=Allied+Electronics, ComponentLink2URL=https://datasheet.ciiva.com/14593/70096008-14593753.pdf?src-supplier=Allied+Electronics, Construction=Flat, Depth=4.3mm, Dissipation Factor=8%, Features="General Purpose", Height=4mm, Height - Seated (Max)=0.169inch, Length=7.3mm, Life (Hours)=2000Hour, Manufacturer Part Number=T530X337M010ATE004, Mount="Surface Mount,PCB", Packaging="Tape and Reel", Polarity=Polar, Pricing 1="1=7.14000, 10=6.34700, 50=5.55360, 100=5.07760 (USD)", REACH SVHC="No SVHC", RoHS=Yes, RoHS Compliant=Yes, Series=T530, Stock 1=419, Supplier 1=Digi-Key, Termination=SMD/SMT, Voltage Rating=10V, Voltage Rating (DC)=10V, Width=4.3mm
C11: library part VJ0805Y103KNAAO, "CAP CER 10000PF 50V X7R 0805", Case Code (Imperial)=0805, Case Code (Metric)=2012, Dielectric=X7R, Manufacturer="Vishay Vitramon", Max Operating Temperature=125°C, Min Operating Temperature=-55°C, Package Quantity=1, Supplier Part Number 1=720-1244-1-ND, Tolerance=10%, Voltage=50V, Capacitance=10nF, Case/Package=0805, Category="Ceramic Capacitors", ComponentLink1Description=https://datasheet.ciiva.com/25613/0900766b8104796c-25613141.pdf?src-supplier=RSComponents, ComponentLink1URL=https://datasheet.ciiva.com/25613/0900766b8104796c-25613141.pdf?src-supplier=RSComponents, ComponentLink2Description=https://datasheet.ciiva.com/148/nonmagneticepoxybond-148342.pdf?src-supplier=Digi-Key, ComponentLink2URL=https://datasheet.ciiva.com/148/nonmagneticepoxybond-148342.pdf?src-supplier=Digi-Key, ComponentLink3Description=https://datasheet.ciiva.com/148/nonmagneticepoxybond-148343.pdf?src-supplier=Digi-Key, ComponentLink3URL=https://datasheet.ciiva.com/148/nonmagneticepoxybond-148343.pdf?src-supplier=Digi-Key, ComponentLink4Description=https://datasheet.ciiva.com/148/nonmagneticepoxybond-148344.pdf?src-supplier=Digi-Key, ComponentLink4URL=https://datasheet.ciiva.com/148/nonmagneticepoxybond-148344.pdf?src-supplier=Digi-Key, ComponentLink5Description=https://datasheet.ciiva.com/46417/1805046-46417853.pdf?src-supplier=Element14, ComponentLink5URL=https://datasheet.ciiva.com/46417/1805046-46417853.pdf?src-supplier=Element14, ComponentLink6Description=https://datasheet.ciiva.com/46417/1805046-46417854.pdf?src-supplier=Element14, ComponentLink6URL=https://datasheet.ciiva.com/46417/1805046-46417854.pdf?src-supplier=Element14, Construction=Flat, Depth=1.25mm, Height=1.45mm, Length=2mm, Manufacturer Part Number=VJ0805Y103KNAAO, Mount="Surface Mount", Packaging="Tape and Reel", Pricing 1="1=0.74000, 10=0.45300, 50=0.32540, 100=0.28140 (USD)", Radiation Hardening=No, REACH SVHC=Unknown, RoHS=Yes, RoHS Compliant=Yes, Series=VJ, Stock 1=190, Supplier 1=Digi-Key, Termination=SMD/SMT, Thickness=0.057inch, Voltage Rating=50V, Voltage Rating (DC)=50V, Width=0.049inch
J1 J2 J3 J4 J5 J6: library part PAD_HOLE_4MM*1.5MM, "pin with a hole 4mm*1.5mm"
L1: library part DR125-3R3-R, "Fixed Inductors 3.3uH 12.7A 0.0063ohms", Case/Package=Nonstandard, Current Rating=9.26A, DC Resistance (DCR)=6.3mR, Inductance=3.3uH, Inductance Tolerance=20%, Manufacturer="Eaton Cooper", Max Operating Temperature=125°C, Min Operating Temperature=-40°C, Package Quantity=600, Resistor Type=Wirewound, Saturation Current=12.7A, Self Resonant Frequency=100kHz, Supplier Part Number 1=513-1529-1-ND, Category="Fixed Inductors", Core Material=Ferrite, Depth=12.5mm, Height=6mm, Height - Seated (Max)=0.236inch, Length=12.5mm, Manufacturer Part Number=DR125-3R3-R, Max DC Current=9.26A, Military Standard=Not, Mount="Surface Mount", Number of Pins=2, Packaging="Tape and Reel", Pricing 1="1=1.22000, 10=1.13800, 25=1.05000, 50=0.87500, 100=0.82250, 250=0.73500 (USD)", Radiation Hardening=No, REACH SVHC="No SVHC", RMS Current (Irms)=9.26A, RoHS=Yes, Shielding=Shielded, Stock 1=3019, Supplier 1=Digi-Key, Termination=SMD/SMT, Test Frequency=100kHz, Tolerance=20%, Width=0.492inch
L2: library part DR125-2R2-R, "FIXED IND 2.2UH 10.9A 4.5 MOHM", Case/Package=Nonstandard, Current Rating=10.9A, DC Resistance (DCR)=4.5mR, Inductance=2.2uH, Inductance Tolerance=20%, Manufacturer="Eaton Cooper", Max Operating Temperature=125°C, Min Operating Temperature=-40°C, Package Quantity=600, Resistor Type=Wirewound, Saturation Current=15A, Self Resonant Frequency=100kHz, Supplier Part Number 1=513-1662-1-ND, Category="Fixed Inductors", ComponentLink1Description=https://datasheet.ciiva.com/14667/0900766b8116a153-14667792.pdf?src-supplier=RSComponents, ComponentLink1URL=https://datasheet.ciiva.com/14667/0900766b8116a153-14667792.pdf?src-supplier=RSComponents, ComponentLink2Description=https://datasheet.ciiva.com/26926/getdatasheetpartid-571249-26926912.pdf?src-supplier=Verical, ComponentLink2URL=https://datasheet.ciiva.com/26926/getdatasheetpartid-571249-26926912.pdf?src-supplier=Verical, ComponentLink3Description=https://datasheet.ciiva.com/8004/87246-8004874.pdf?src-supplier=Element14, ComponentLink3URL=https://datasheet.ciiva.com/8004/87246-8004874.pdf?src-supplier=Element14, Core Material=Ferrite, DC Current=10.9A, Depth=12.5mm, Height=6mm, Height - Seated (Max)=0.236inch, Lead Free="Lead Free", Length=12.5mm, Manufacturer Part Number=DR125-2R2-R, Max DC Current=10.9A, Military Standard=Not, Mount="Surface Mount", Number of Pins=2, Packaging="Tape and Reel", Pricing 1="1=1.22000, 10=1.13800, 25=1.05000, 50=0.87500, 100=0.82250, 250=0.73500 (USD)", Radiation Hardening=No, Rated Current-Max=10.9A, REACH SVHC="No SVHC", RMS Current (Irms)=10.9A, RoHS=Yes, RoHS Compliant=Yes, Series=DR, Shielding=Shielded, Stock 1=1356, Supplier 1=Digi-Key, Termination=SMD/SMT, Test Frequency=100kHz, Tolerance=20%, Weight=0.144oz, Width=0.492inch
Q1 Q2: "MOSFET 2N-CH 30V 5.8A 8-SOIC", Case/Package=SO, Continuous Drain Current (ID)=8.2A, Drain to Source Resistance=11.5mR, Drain to Source Voltage (Vdss)=30V, Drain-source On Resistance-Max=18.5mR, Gate to Source Voltage (Vgs)=20V, Manufacturer="Vishay Siliconix", Max Operating Temperature=150°C, Max Power Dissipation=1.25W, Min Operating Temperature=-55°C, Package Quantity=1, Supplier Part Number 1=SI4816BDY-T1-E3CT-ND, Threshold Voltage=1V, Category=MOSFETs, ComponentLink1Description=https://datasheet.ciiva.com/15137/getdatasheetpartid-99188-15137841.pdf?src-supplier=Verical, ComponentLink1URL=https://datasheet.ciiva.com/15137/getdatasheetpartid-99188-15137841.pdf?src-supplier=Verical, ComponentLink2Description=https://datasheet.ciiva.com/7710/si4816bd-7710449.pdf?src-supplier=Element14, ComponentLink2URL=https://datasheet.ciiva.com/7710/si4816bd-7710449.pdf?src-supplier=Element14, ComponentLink3Description=https://datasheet.ciiva.com/26789/si4816bdy-t1-e3-26789112.pdf?src-supplier=IIIC, ComponentLink3URL=https://datasheet.ciiva.com/26789/si4816bdy-t1-e3-26789112.pdf?src-supplier=IIIC, ComponentLink4Description=https://datasheet.ciiva.com/11161/si4816bd-11161496.pdf?src-supplier=Avnet, ComponentLink4URL=https://datasheet.ciiva.com/11161/si4816bd-11161496.pdf?src-supplier=Avnet, ComponentLink5Description=https://datasheet.ciiva.com/928/si4816bd-928460.pdf?src-supplier=Digi-Key, ComponentLink5URL=https://datasheet.ciiva.com/928/si4816bd-928460.pdf?src-supplier=Digi-Key, ComponentLink6Description=https://datasheet.ciiva.com/16486/si4816bd-16486349.pdf?src-supplier=Future+Electronics, ComponentLink6URL=https://datasheet.ciiva.com/16486/si4816bd-16486349.pdf?src-supplier=Future+Electronics, ComponentLink7Description=https://datasheet.ciiva.com/26136/si4816bd-26136990.pdf?src-supplier=Avnet+Europe, ComponentLink7URL=https://datasheet.ciiva.com/26136/si4816bd-26136990.pdf?src-supplier=Avnet+Europe, ComponentLink8Description=https://datasheet.ciiva.com/18448/70026226-18448822.pdf?src-supplier=Allied+Electronics, ComponentLink8URL=https://datasheet.ciiva.com/18448/70026226-18448822.pdf?src-supplier=Allied+Electronics, ComponentLink9Description=https://datasheet.ciiva.com/928/si4816bd-928458.pdf?src-supplier=Digi-Key, ComponentLink9URL=https://datasheet.ciiva.com/928/si4816bd-928458.pdf?src-supplier=Digi-Key, ComponentLink10Description=https://datasheet.ciiva.com/928/si4816bd-928459.pdf?src-supplier=Digi-Key, ComponentLink10URL=https://datasheet.ciiva.com/928/si4816bd-928459.pdf?src-supplier=Digi-Key, Element Configuration=Single, Fall Time=9ns, FET Type="2 N-Channel", Height=1.55mm, Lead Free="Lead Free", Length=5mm, Manufacturer Part Number=SI4816BDY-T1-E3, Mount="Surface Mount", Nominal Vgs=3V, Number of Channels=2, Number of Elements=2, Number of Pins=8, On-State Resistance=18.5mR, Packaging="Tape and Reel", Polarity=N-CHANNEL, Pricing 1="1=1.72000, 10=1.54500, 25=1.45760, 100=1.24180, 500=1.02024, 1000=0.84535 (USD)", Radiation Hardening=No, Rds On Max=18.5mR, REACH SVHC=Unknown, Rise Time=9ns, RoHS=Yes, RoHS Compliant=Yes, Series="LITTLE FOOT®", Stock 1=70, Supplier 1=Digi-Key, Turn-Off Delay Time=31ns, Turn-On Delay Time=13ns, Weight=0.006596oz, Width=4mm
R1 R2 R13 R15: library part ERJ-6GEY0R00V, "Resistor Thick Film 0805 0 Ohm 1-8w Surface Mount Embossed Carrier Tape and Reel", Case Code (Imperial)=0805, Case Code (Metric)=2012, Current Rating=2A, Manufacturer=Panasonic, Max Operating Temperature=155°C, Max Power Dissipation=125mW, Min Operating Temperature=-55°C, Package Quantity=1, Resistor Type="Thick Film", Supplier Part Number 1=P0.0ACT-ND, Temperature Coefficient=600ppm/°C, Tolerance=5%, Voltage Rating=150V, Case/Package=0805, Category="Chip SMD Resistors", ComponentLink1Description=https://datasheet.ciiva.com/11821/0900766b80f806dd-11821735.pdf?src-supplier=RSComponents, ComponentLink1URL=https://datasheet.ciiva.com/11821/0900766b80f806dd-11821735.pdf?src-supplier=RSComponents, ComponentLink2Description=https://datasheet.ciiva.com/28695/1678796-28695877.pdf?src-supplier=Element14, ComponentLink2URL=https://datasheet.ciiva.com/28695/1678796-28695877.pdf?src-supplier=Element14, ComponentLink3Description=https://datasheet.ciiva.com/43460/1678796-43460073.pdf?src-supplier=Farnell, ComponentLink3URL=https://datasheet.ciiva.com/43460/1678796-43460073.pdf?src-supplier=Farnell, ComponentLink4Description=https://datasheet.ciiva.com/9117/aoa0000ce1-9117354.pdf?src-supplier=Avnet, ComponentLink4URL=https://datasheet.ciiva.com/9117/aoa0000ce1-9117354.pdf?src-supplier=Avnet, ComponentLink5Description=https://datasheet.ciiva.com/46377/1678796-46377866.pdf?src-supplier=Element14, ComponentLink5URL=https://datasheet.ciiva.com/46377/1678796-46377866.pdf?src-supplier=Element14, Construction=Rectangular, Contact Plating=Tin, Depth=1.25mm, Features="Automotive AEC-Q200", Height=0.6mm, Lead Free="Lead Free", Length=2mm, Manufacturer Part Number=ERJ-6GEY0R00V, Military Standard=Not, Mount="Surface Mount", Number of Terminations=2, Packaging="Tape and Reel", Power Rating=125mW, Pricing 1="1=0.10000, 10=0.04900, 25=0.03560, 50=0.02720, 100=0.02010, 250=0.01528, 500=0.01224, 1000=0.00901 (USD)", Radiation Hardening=No, REACH SVHC="No SVHC", Resistance=0R, RoHS=Yes, RoHS Compliant=Yes, Series=ERJ, Supplier 1=Digi-Key, Technology="THICK FILM", Termination=SMD/SMT, Voltage Rating (DC)=150V, Width=1.25mm
R3: library part CRCW080510R0JNEAC, "RES 10 OHM 5% 1/8W 0805", Case/Package=0805, Manufacturer="Vishay Semiconductors", Power Rating=125mW, Supplier Part Number 1=541-4167-1-ND, Tolerance=5%, Category=Resistors, ComponentLink1Description=http://www.vishay.com/docs/28773/crcwce3.pdf?src-supplier=Digi-Key, ComponentLink1URL=http://www.vishay.com/docs/28773/crcwce3.pdf?src-supplier=Digi-Key, Lead Free="Lead Free", Manufacturer Part Number=CRCW080510R0JNEAC, Pricing 1="1=0.10000, 10=0.04000, 100=0.01630, 1000=0.00731, 2500=0.00635 (USD)", Resistance=10R, RoHS=Yes, RoHS Compliant=Yes, Stock 1=34379, Supplier 1=Digi-Key
R4 R5: library part ERJ-6RQF1R0V, "SISTOR, THICK FILM, 1 OHM, 125mW, 1%; Product Range:PANASONIC - ERJ Series; Resistance:1ohm; Power Rating:125mW; Resistance Tolerance:± 1%; Resistor Case Style:0805 ^2012 Metric]; Resistor Element Type:Thick Film; MSL:-", Case Code (Imperial)=0805, Case Code (Metric)=2012, Manufacturer=Panasonic, Max Operating Temperature=125°C, Max Power Dissipation=125mW, Min Operating Temperature=-55°C, Package Quantity=5000, Resistance Tolerance=1%, Resistor Type="Thick Film", Supplier Part Number 1=P1.0DCT-ND, Temperature Coefficient=200ppm/°C, Case/Package=0805, Category="Chip SMD Resistors", ComponentLink1Description=https://datasheet.ciiva.com/11818/0900766b80eefa12-11818468.pdf?src-supplier=RSComponents, ComponentLink1URL=https://datasheet.ciiva.com/11818/0900766b80eefa12-11818468.pdf?src-supplier=RSComponents, ComponentLink2Description=https://datasheet.ciiva.com/36525/1381829-36525978.pdf?src-supplier=Jameco, ComponentLink2URL=https://datasheet.ciiva.com/36525/1381829-36525978.pdf?src-supplier=Jameco, ComponentLink3Description=https://datasheet.ciiva.com/46446/391509-46446341.pdf?src-supplier=Element14, ComponentLink3URL=https://datasheet.ciiva.com/46446/391509-46446341.pdf?src-supplier=Element14, ComponentLink4Description=https://datasheet.ciiva.com/28691/391509-28691990.pdf?src-supplier=Element14, ComponentLink4URL=https://datasheet.ciiva.com/28691/391509-28691990.pdf?src-supplier=Element14, ComponentLink5Description=https://datasheet.ciiva.com/16783/70068852-16783991.pdf?src-supplier=Allied+Electronics, ComponentLink5URL=https://datasheet.ciiva.com/16783/70068852-16783991.pdf?src-supplier=Allied+Electronics, ComponentLink6Description=https://datasheet.ciiva.com/9198/aoa0000ce3-9198856.pdf?src-supplier=Avnet, ComponentLink6URL=https://datasheet.ciiva.com/9198/aoa0000ce3-9198856.pdf?src-supplier=Avnet, ComponentLink7Description=https://datasheet.ciiva.com/17215/aoa0000ce3-17215193.pdf?src-supplier=Avnet+Europe, ComponentLink7URL=https://datasheet.ciiva.com/17215/aoa0000ce3-17215193.pdf?src-supplier=Avnet+Europe, ComponentLink8Description=https://datasheet.ciiva.com/16507/aoa0000ce3-16507437.pdf?src-supplier=Future+Electronics, ComponentLink8URL=https://datasheet.ciiva.com/16507/aoa0000ce3-16507437.pdf?src-supplier=Future+Electronics, Construction=Rectangular, Contact Plating=Tin, Depth=1.25mm, Height=0.6mm, Lead Free="Lead Free", Length=2mm, Manufacturer Part Number=ERJ-6RQF1R0V, Military Standard=Not, Mount="Surface Mount", Number of Pins=2, Number of Terminations=2, Packaging="Tape and Reel", Power Rating=125mW, Pricing 1="1=0.32000, 10=0.27000, 25=0.19600, 50=0.14200, 100=0.10540, 250=0.08084, 500=0.06370, 1000=0.04410 (USD)", Radiation Hardening=No, REACH SVHC="No SVHC", Resistance=1R, RoHS=Yes, RoHS Compliant=Yes, Series=ERJ, Size Code=0805, Stock 1=1952, Supplier 1=Digi-Key, Technology="THICK FILM", Termination=SMD/SMT, Tolerance=1%, Width=1.2mm
R6 R7 R9 R10: library part KTR10EZPF2003, "RES SMD 200K OHM 1% 1/8W 0805", Case Code (Imperial)=0805, Case Code (Metric)=2012, Manufacturer=Rohm, Max Operating Temperature=155°C, Max Power Dissipation=125mW, Min Operating Temperature=-55°C, Resistance=200kR, Resistor Type="Thick Film", Supplier Part Number 1=RHM200KAHCT-ND, Temperature Coefficient=100ppm/°C, Tolerance=1%, Case/Package=0805, Category="Chip SMD Resistors", ComponentLink1Description=https://www.rohm.com/datasheet/KTR03EZPF/ktr-e?src-supplier=Digi-Key, ComponentLink1URL=https://www.rohm.com/datasheet/KTR03EZPF/ktr-e?src-supplier=Digi-Key, Features="Automotive AEC-Q200", Manufacturer Part Number=KTR10EZPF2003, Number of Terminations=2, Packaging="Tape and Reel", Pricing 1="1=0.18000, 10=0.15200, 100=0.05930, 1000=0.02484, 2500=0.02277 (USD)", RoHS=Yes, RoHS Compliant=Yes, Series=KTR, Stock 1=21418, Supplier 1=Digi-Key
R8 R11: library part RMCF0805JT10K0, "RES 10K OHM 5% 1/8W 0805", Case Code (Imperial)=0805, Case Code (Metric)=2012, Manufacturer="Stackpole Electronics", Max Operating Temperature=155°C, Max Power Dissipation=125mW, Min Operating Temperature=-55°C, Resistance=10kR, Resistor Type="Thick Film", Supplier Part Number 1=RMCF0805JT10K0CT-ND, Temperature Coefficient=100ppm/°C, Tolerance=5%, Case/Package=0805, Category="Chip SMD Resistors", ComponentLink1Description=https://datasheet.ciiva.com/15193/getdatasheetpartid-363745-15193627.pdf?src-supplier=Verical, ComponentLink1URL=https://datasheet.ciiva.com/15193/getdatasheetpartid-363745-15193627.pdf?src-supplier=Verical, Construction=Rectangular, Contact Plating=Tin,Matte, Depth=1.25mm, Features="Automotive AEC-Q200", Height=0.026inch, Lead Free="Lead Free", Length=2mm, Manufacturer Part Number=RMCF0805JT10K0, Military Standard=Not, Mount="Surface Mount", Number of Terminations=2, Packaging="Tape and Reel", Power Rating=125mW, Pricing 1="1=0.10000, 10=0.02000, 100=0.00810, 1000=0.00366, 2500=0.00318 (USD)", Radiation Hardening=No, RoHS=Yes, RoHS Compliant=Yes, Series=RMCF, Size Code=0805, Stock 1=1286085, Supplier 1=Digi-Key, Width=0.049inch
R12 R14 R16 R17 R18: library part RES
U1: "IC MAIN PWR CTRLR QUAD 32-QFN", Case/Package=QFN, Manufacturer=Intersil, Max Operating Temperature=100°C, Min Operating Temperature=-40°C, Output Current=20A, Package Quantity=6000, Switching Frequency=500kHz, Category=Uncategorized, ComponentLink1Description=https://datasheet.ciiva.com/2079/fn6453-2079351.pdf?src-supplier=Digi-Key, ComponentLink1URL=https://datasheet.ciiva.com/2079/fn6453-2079351.pdf?src-supplier=Digi-Key, ComponentLink2Description=https://datasheet.ciiva.com/24138/fn6453-80078-24138323.pdf?src-supplier=Mouser, ComponentLink2URL=https://datasheet.ciiva.com/24138/fn6453-80078-24138323.pdf?src-supplier=Mouser, ComponentLink3Description=https://datasheet.ciiva.com/25905/fn6453-25905352.pdf?src-supplier=Avnet+Europe, ComponentLink3URL=https://datasheet.ciiva.com/25905/fn6453-25905352.pdf?src-supplier=Avnet+Europe, Height=0.95mm, Length=5mm, Manufacturer Part Number=ISL6236AIRZ-T, Mount="Surface Mount", Number of Outputs=2, Number of Pins=32, Packaging="Tape and Reel", Pricing 1="6000=3.10391, 12000=3.03600, 24000=2.99000, 36000=2.94400, 48000=2.89800, 60000=2.85200, 600000=2.80600 (USD)", Radiation Hardening=No, RoHS=Yes, RoHS Compliant=Yes, Series=ISL6236, Supplier 1=Avnet, Supplier Part Number 1=ISL6236AIRZ-T, Width=5mm

## Via types
v1: diameter 0.6, hole 0.3, L1 to L6, tented both sides, 93 vias

## Nets (pads, with @x,y where several pads share a name; then routed paths per layer and width w, separated by ;. In a path a pad name is that pad's centre, name@x,y a point inside that pad or via, vN(x,y) a via of type N, cw(c..) or ccw(c..) an arc to the next point about the centre after c; other vN are vias at no path point)
+1V5: C9.1 J3.1 L1.1 R12.2 U1.10 | length 14.7
  L1 w0.2: C9.1@38.8,14.5 C9.1 C9.1@39.3,14
  L3 w1: v1(30.65,19.55) 35.6,14.6 v1(35.6,13.5)
  L6 w0.2: U1.10 26.265,22.585 26.265,22.147 27.912,20.5 ; R12.2 v1(30.65,19.55)
  L6 w0.5: 27.912,20.5 28.525,20.5 29.475,19.55 R12.2
+1V05: C10.1 J4.1 L2.2 U1.30 | length 15.1
  L1 w0.2: C10.1@38.5,35.8 C10.1 C10.1@38.9,36
  L3 w0.5: v1(25.7,28.2) 25.719,28.219 26.319,28.219 33.9,35.8 33.9,36.4 v1(35.9,36.4)
  L6 w0.2: U1.30 v1@25.75,27.95
"+5V LDO": C1.2 R1.2 U1.7 | length 26.7
  L3 w0.5: v1(11.8,25) 14.378,25 14.678,25.3 15.799,25.3 16.149,25.65 21.811,25.65 22.908,24.552 22.908,23.554 23.562,22.9 28,22.9 28.15,23.05 v1(29.55,23.05)
  L6 w0.2: U1.7 28.25,23.75 28.5,23.5 ; C1.2 v1(29.55,23.05)
  L6 w0.5: v1(11.8,25) R1.2 ; 28.5,23.5 28.5,22.017 28.617,21.9 C1.2
"+5V PVCC": C3.2 R1.1 R2.2 R3.1 U1.19 | length 13
  L6 w0.2: C3.2 20.5,24.7 21.1,24.1 21.949,24.1 22.099,24.25 U1.19
  L6 w0.5: R1.1 R1.1@15.65,25.225 ; 15.65,25.65 16.3,26.3 18.35,26.3 19.75,24.9 C3.2
  L6 w0.6: R1.1@15.65,25.225 15.65,25.65 R2.2 R3.1
"+5V VCC": C4.2 R3.2 R8.2 R9.2 R10.2 R11.2 R13.2 R16.2 U1.2 U1.3 U1.20 | length 20.1
  L6 w0.2: v1(11.8,32.7) R10.2 ; v1(11.9,34.9) R9.2 ; v1(21.7,24.7) 21.75,24.75 U1.20 ; R16.2 v1(28.3,36.6) ; v1(27.4,15.7) R13.2 ; U1.3 27.415,25.765 27.931,25.765 28.115,25.95 28.115,25.995 28.3,26.18 28.3,26.6 ; U1.2 27.415,26.265 v1(27.865,26.265) ; R8.2 29.7,35.15 v1(29.7,36.6)
  L6 w0.5: v1(11.8,29.7) R3.2 ; v1(22.7,16.7) R11.2 ; 28.3,26.6 28.3,29.107 28.593,29.4 29.45,29.4 29.65,29.6 29.65,30 30.381,30.731 30.381,31.081 v1(30.4,31.1)
+REF: C12.1 R14.2 U1.1 | length 10.3
  L6 w0.2: U1.1 27.585,26.75 27.6,26.765 27.6,26.95 27.6,30.4
  L6 w0.5: R14.2 27.35,34.175 28.45,33.075 29.45,33.075 29.65,32.875 29.65,32.6 29.45,32.4 29.25,32.4 27.6,30.75 27.6,30.4
+VIN: C2.2 C5.2 C6.2 J1.1 Q1.8 Q2.8 R2.1 U1.6 | length 38.7
  L1 w0.5: J1.1 5.947,30 7.347,28.6 10.6,28.6 v1(11.8,27.4) 11.819,27.381 11.819,27.131 18.15,20.8 C5.2 ; C6.2@15.05,43.2 C6.2 ; C5.2@18.15,19.2 C5.2 ; v1(29.7,25.5) 27.1,22.9 22.4,22.9 19.5,20 C5.2
  L6 w0.2: v1(11.8,27.4) R2.1 ; U1.6 29.5,24.25 C2.2 29.7,24.45 v1(29.7,25.5)
+VREF3: C11.1 R15.2 U1.5 | length 26.8
  L6 w0.2: U1.5 28.199,24.75 28.915,25.466 28.915,25.664 29.1,25.849 29.1,25.95 29.7,26.55 29.7,28 29.966,28.266
  L6 w0.5: R15.2@27.25,38.8 27.25,38.6 27.35,38.5 33,38.5 34.8,36.7 34.8,28.417 34.649,28.266 29.966,28.266
EN1: R11.1 U1.14 | length 4.3
  L6 w0.2: R11.1 22.7,20.283 22.817,20.4 23.8,20.4 24.25,20.85 U1.14
EN_LDO: R8.1 U1.4 | length 17.5
  L6 w0.2: U1.4 28.134,25.25 28.515,25.632 28.515,25.83 28.7,26.014 28.7,26.222 28.85,26.372 28.85,28.099 29.567,28.816 33.838,28.816 33.955,28.933 33.955,34.345 33.4,34.9 31.75,34.9 R8.1
FB1: R12.1 R13.1 R17.2 U1.11 | length 12.4
  L6 w0.2: U1.11 25.75,21.884 25.917,21.717 ; R12.1 R17.2
  L6 w0.5: 25.917,21.717 26.368,21.266 26.368,20.357 27.225,19.5 R13.1@27.45,19.5 ; R13.1 R13.1@27.45,19.5 ; R17.2 R12.1 28.65,17.65 28.5,17.8 28.5,18.491 28.3,18.691 28.3,19.383 28.233,19.45 27.5,19.45 R13.1@27.45,19.5
GND: C1.1 C2.1 C3.1 C4.1 C5.1 C6.1 C9.2 C10.2 C11.2 C12.2 J2.1 J5.1 J6.1 Q1.2 Q1.3 Q2.2 Q2.3 R6.1 R7.2 R17.1 R18.1 U1.8 U1.21 U1.22 U1.29 U1.33 | length 12.2
  L6 w0.2: v1(16.9,24.7) C3.1 ; U1.21 23.45,25.25 23.9,25.7 v1(23.9,26.1) 23.55,25.75 U1.22 ; v1(25.1,28.8) 25.1,27.951 25.235,27.816 25.235,27.415 U1.29 ; R18.1 v1(28.2,41) ; U1.8 27.4,22.2 v1(27.6,22)
  L6 w0.5: v1(24.4,32.4) 24.427,32.4 24.477,32.35 R7.2 ; v1(25,16.4) R6.1 ; R17.1 33.523,19.55 33.573,19.6 v1(33.6,19.6)
  other v1: 9.5,13 11,13 9.6,14.2 11,14.3 9.6,15.4 11.1,15.6 9.5,16.6 10.5,16.6 40.9,18.6 37.2,18.8 14.1,19.2 40.9,19.8 14.1,20 37.1,20.1 14.1,20.8 40.8,21.2 37.1,21.3 33.6,21.5 33.6,22.2 23.8,23.9 26.2,23.9 32.5,24 32.5,24.7 26.2,26.1 32.5,26.3 32.5,27 37.9,27.9 39.6,28 32.5,29.4 36.8,29.6 40.7,29.6 32.5,30.1 9.4,31.2 40.4,31.5 36.8,31.6 32.5,32.4 8.3,32.9 10.5,32.9 32.5,33.1 9.5,34.4 8.2,35.7 10.5,35.7 9.4,37.2 8.3,38.4 9.9,38.4 11,38.5 10.8,39.7 9.3,39.9 8.3,41.2 10.5,41.2 19.4,43.1 19.4,43.9 19.3,44.8
LGATE1: Q1.4 U1.18 | length 22.9
  L1 w0.2: Q1.4@12.27,13.098 Q1.4
  L1 w0.5: Q1.4 12.274,13.094 v1(13.497,13.093) v1(13.497,13.093)
  L3 w1: v1(13.497,13.093) 12.049,14.541 12.049,23.469 21.469,23.469 v1(21.5,23.5)
  L6 w0.2: v1(21.5,23.5) 21.608,23.5 21.808,23.7 22.114,23.7 22.149,23.735 22.585,23.735 U1.18
LGATE2: Q2.4 U1.23 | length 17.4
  L1 w0.2: Q2.4@12.17,37.098 Q2.4
  L1 w0.5: Q2.4 Q2.4 13.396,37.094 v1(13.397,37.093)
  L3 w0.2: 21.1,26.6 v1(21.5,26.6)
  L3 w1: v1(13.397,37.093) 14.8,35.69 14.8,31.5 19.7,26.6 21.1,26.6
  L6 w0.2: v1(21.5,26.6) 21.577,26.523 21.987,26.523 22.176,26.335 22.214,26.335 22.284,26.265 22.585,26.265 U1.23
NetC7_2: C7.2 R4.1 | length 2.3
  L6 w0.2: C7.2 17.95,22.2 R4.1
NetC8_1: C8.1 R5.2 | length 2.4
  L6 w0.2: C8.1 18.15,29.5 R5.2
NetR4_2: R4.2 U1.17 | length 3.1
  L6 w0.2: R4.2 21.7,22.4 22.024,22.724 22.024,23.133 22.141,23.25 U1.17
NetR5_1: R5.1 U1.24 | length 2.8
  L6 w0.2: R5.1 20.15,27.3 21.865,27.3 22.4,26.765 22.585,26.765 U1.24
NetR6_2: R6.2 U1.12 | length 3.4
  L6 w0.2: R6.2 25.15,19.55 25.4,19.8 25.4,20.7 25.5,20.8 25.5,21.357 25.25,21.607 U1.12
NetR7_1: R7.1 U1.31 | length 3.5
  L6 w0.2: R7.1 25.925,30.45 26.3,30.075 26.3,27.951 26.25,27.901 U1.31
NetU1_9: U1.9
PHASE1: C7.1 L1.2 Q1.5 Q1.6 Q1.7 U1.16 | length 12.3
  L1 w0.2: L1.2@22.23,13.095 L1.2
  L3 w1: v1(19,13.1) 19.85,13.95 v1(19.85,18.35)
  L6 w0.2: 22.841,21.6 23.25,22.009 U1.16
  L6 w0.4: v1(19.85,18.35) C7.1 21.1,20.2 22.5,21.6 22.841,21.6
PHASE2: C8.2 L2.1 Q2.5 Q2.6 Q2.7 U1.25 | length 12.5
  L1 w0.2: L2.1@22.23,37.095 L2.1
  L3 w1: v1(19,37.1) 19,32.2 v1(19.85,31.35)
  L6 w0.2: 22.8,27.9 22.935,27.9 23.25,27.585 U1.25
  L6 w0.4: v1(19.85,31.35) C8.2 19.85,29.5 20.1,29.25 20.3,29.25 21.65,27.9 22.8,27.9
POK1: R10.1 U1.13 U1.27 | length 37
  L3 w0.2: v1(21.8,31.9) 22.5,31.9 24.5,29.9 24.5,27.6 24.8,27.3 30.183,27.3 30.183,26.317 30.7,25.8 30.7,21.9 29.9,21.1 v1(24.9,21.1)
  L6 w0.2: R10.1 21.1,32.7 24.1,29.7 24.1,28.386 24.25,28.236 U1.27 ; U1.13 24.75,21.358 24.9,21.208 v1(24.9,21.1)
POK2: R9.1 U1.28 | length 13.6
  L6 w0.2: R9.1@15.65,34.9 19.7,34.9 24.5,30.1 24.5,28.551 24.7,28.351 24.7,27.786 24.735,27.751 24.735,27.415 U1.28
REFIN2: R14.1 R15.1 R16.1 R18.2 U1.32 | length 15.1
  L6 w0.2: R18.2 R18.2@25.45,40.9 ; 25.45,33.517 25.567,33.4
  L6 w0.3: 25.45,33.517 R14.1 25.45,36.6 25.45,38.8 R18.2@25.45,40.9 ; 25.567,33.4 26.7,33.4 27,33.1 27,29.5 26.75,29.25 U1.32
UGATE1: Q1.1 U1.15 | length 14.6
  L1 w0.2: Q1.1@12.27,16.908 Q1.1 ; v1@13.495,16.905 v1(13.497,16.903)
  L1 w0.5: Q1.1 v1@13.495,16.905
  L3 w1: v1(13.497,16.903) 17.595,21 v1(23.5,21)
  L6 w0.2: v1(23.5,21) 23.5,21.108 23.75,21.358 U1.15
UGATE2: Q2.1 U1.26 | length 21
  L1 w0.2: Q2.1 Q2.1@12.176,40.902 ; v1@13.398,40.902 v1(13.4,40.9)
  L1 w0.5: Q2.1@12.176,40.902 v1@13.398,40.902
  L3 w1: v1(13.4,40.9) 16,38.3 16,33.5 20,29.5 v1(23.4,29.5)
  L6 w0.2: v1(23.4,29.5) 23.4,29.392 23.7,29.092 23.7,28.22 23.75,28.17 U1.26

## Polygon pours and split planes (outlines as drawn)
+VIN on L1 "+VIN_L01_P013" (solid, pour order 13): 16.7,16.5 21.7,16.5 22.1,16.9 22.1,25.477 12.023,25.477 10.7,27.8 8.2,27.8 28.6,27.8 28.6,25.1 31.4,25.1 31.4,28.5 30.7,29.2 24.1,29.2 23.7,29.1 23.7,29.9 7.799,29.602 7.599,42.1 13.9,42.1 14.8,42.1 14.9,42 14.9,40.3 18.1,40.3 18.2,40.4 18.2,42.2 17.6,42.2 16.1,43.7 16.1,46 1.2,46 1.2,27.9 6.6,27.9 12.1,22.4 15.5,22.4 16.6,21.3 16.6,16.6
+1V05 on L1 "+1V05_L01_P008" (solid, pour order 8): 30.3,34.2 30.5,34 37.2,34 37.2,33.5 47.9,33.5 47.6,46.1 37.2,46.1 30.3,46.1
GND on L1 "GND_L01_P027" (solid, pour order 27): 11.5,13.9 13.4,13.9 13.4,16.1 10.9,16.1 10.9,17.3 9,17.3 9,12.5 11.5,12.5
GND on L1 "GND_L01_P025" (solid, pour order 25): 13.2,37.9 13.2,40.2 11.2,40.2 11.2,41.7 7.9,41.7 7.9,30.1 11,30.1 11,37.9
GND on L1 "GND_L01_P017" (solid, pour order 17): 36.7,21.7 36.7,17.9 41.3,17.9 41.3,21.7
GND on L1 "GND_L01_P016" (solid, pour order 16): 36.3,32.2 36.3,27.3 41.1,27.3 41.1,32.2
GND on L1 "GND_L01_P015" (solid, pour order 15): 15.5,21.3 15.5,18.7 13.7,18.7 13.7,21.3
GND on L1 "GND_L01_P014" (solid, pour order 14): 17.7,42.7 20.2,42.7 20.3,42.8 20.3,45.3 17.7,45.3
+1V5 on L1 "+1V5_L01_P006" (solid, pour order 6): 47.1,16.4 47.1,2.9 30.1,3.1 30.1,16.4
PHASE2 on L1 "PHASE2_L01_P005" (solid, pour order 5): 16.4,40 24.5,40 24.5,33.9 20.3,33.9 17.6,36.6 16.4,36.6
PHASE1 on L1 "PHASE1_L01_P004" (solid, pour order 4): 16.6,16 24.5,16 24.5,10 18.5,10 16.6,11.9
GND on L6 "GND_L06_P022" (solid, pour order 22): 32.1,22.8 32.1,21.1 34.2,21.1 34.2,22.8
GND on L6 "GND_L06_P021" (solid, pour order 21): 31,25.1 31,23.6 33.1,23.6 33.1,25.1
GND on L6 "GND_L06_P020" (solid, pour order 20): 31,27.4 31,25.9 33,25.9 33,27.4
GND on L6 "GND_L06_P019" (solid, pour order 19): 31.1,30.5 31.1,29 33,29 33,30.5
GND on L6 "GND_L06_P018" (solid, pour order 18): 31.1,33.5 31.1,32 33.1,32 33.1,33.5
"+5V VCC" on L4 "+5V_VCC_L04_P028" (solid, pour order 28): 7.4,46 7.369,45.969 7.369,7.674 42.3,7.674 42.3,46
GND on L2 (split plane): 49.49,0.51 0.51,0.51 0.51,49.49 49.49,49.49
GND on L5 (split plane): 49.49,0.51 0.51,0.51 0.51,49.49 49.49,49.49

## Silkscreen, mask and mechanical layers (free items; w line width, h text height)
Top Overlay:
  text "1" at 11.654,42.146 h1 r270
  text "OUT2" at 42.854,38.454 h1.52
  text "+VIN" at 1.554,32.454 h1.52
  text "GND" at 43.354,25.854 h1.52
  text "GND" at 43.354,22.554 h1.52
  text "1" at 11.654,18.146 h1 r270
  text "GND" at 3.354,15.854 h1.52
  text "OUT1" at 43.254,9.654 h1.52
Bottom Overlay:
  text "ISL6236A V1" at 34,46.538 h1.52
BOARD OUTLINE:
  the board outline again, w0.254